# Altium PCB Chronos.PcbDoc (part 1 of 6)
Units mm, origin at the board's own origin, x right, y up, seen from the top; angles counter-clockwise.
Board outline 74.94 x 59.01 mm, 8 copper layers (TOP, L02_GND, L03_SIG, L04_PWR, L05_GND, L06_SIG, L07_GND, BOTTOM), stack 1.624 mm thick; 413 components, 238 nets, 1566 pads, 873 vias.
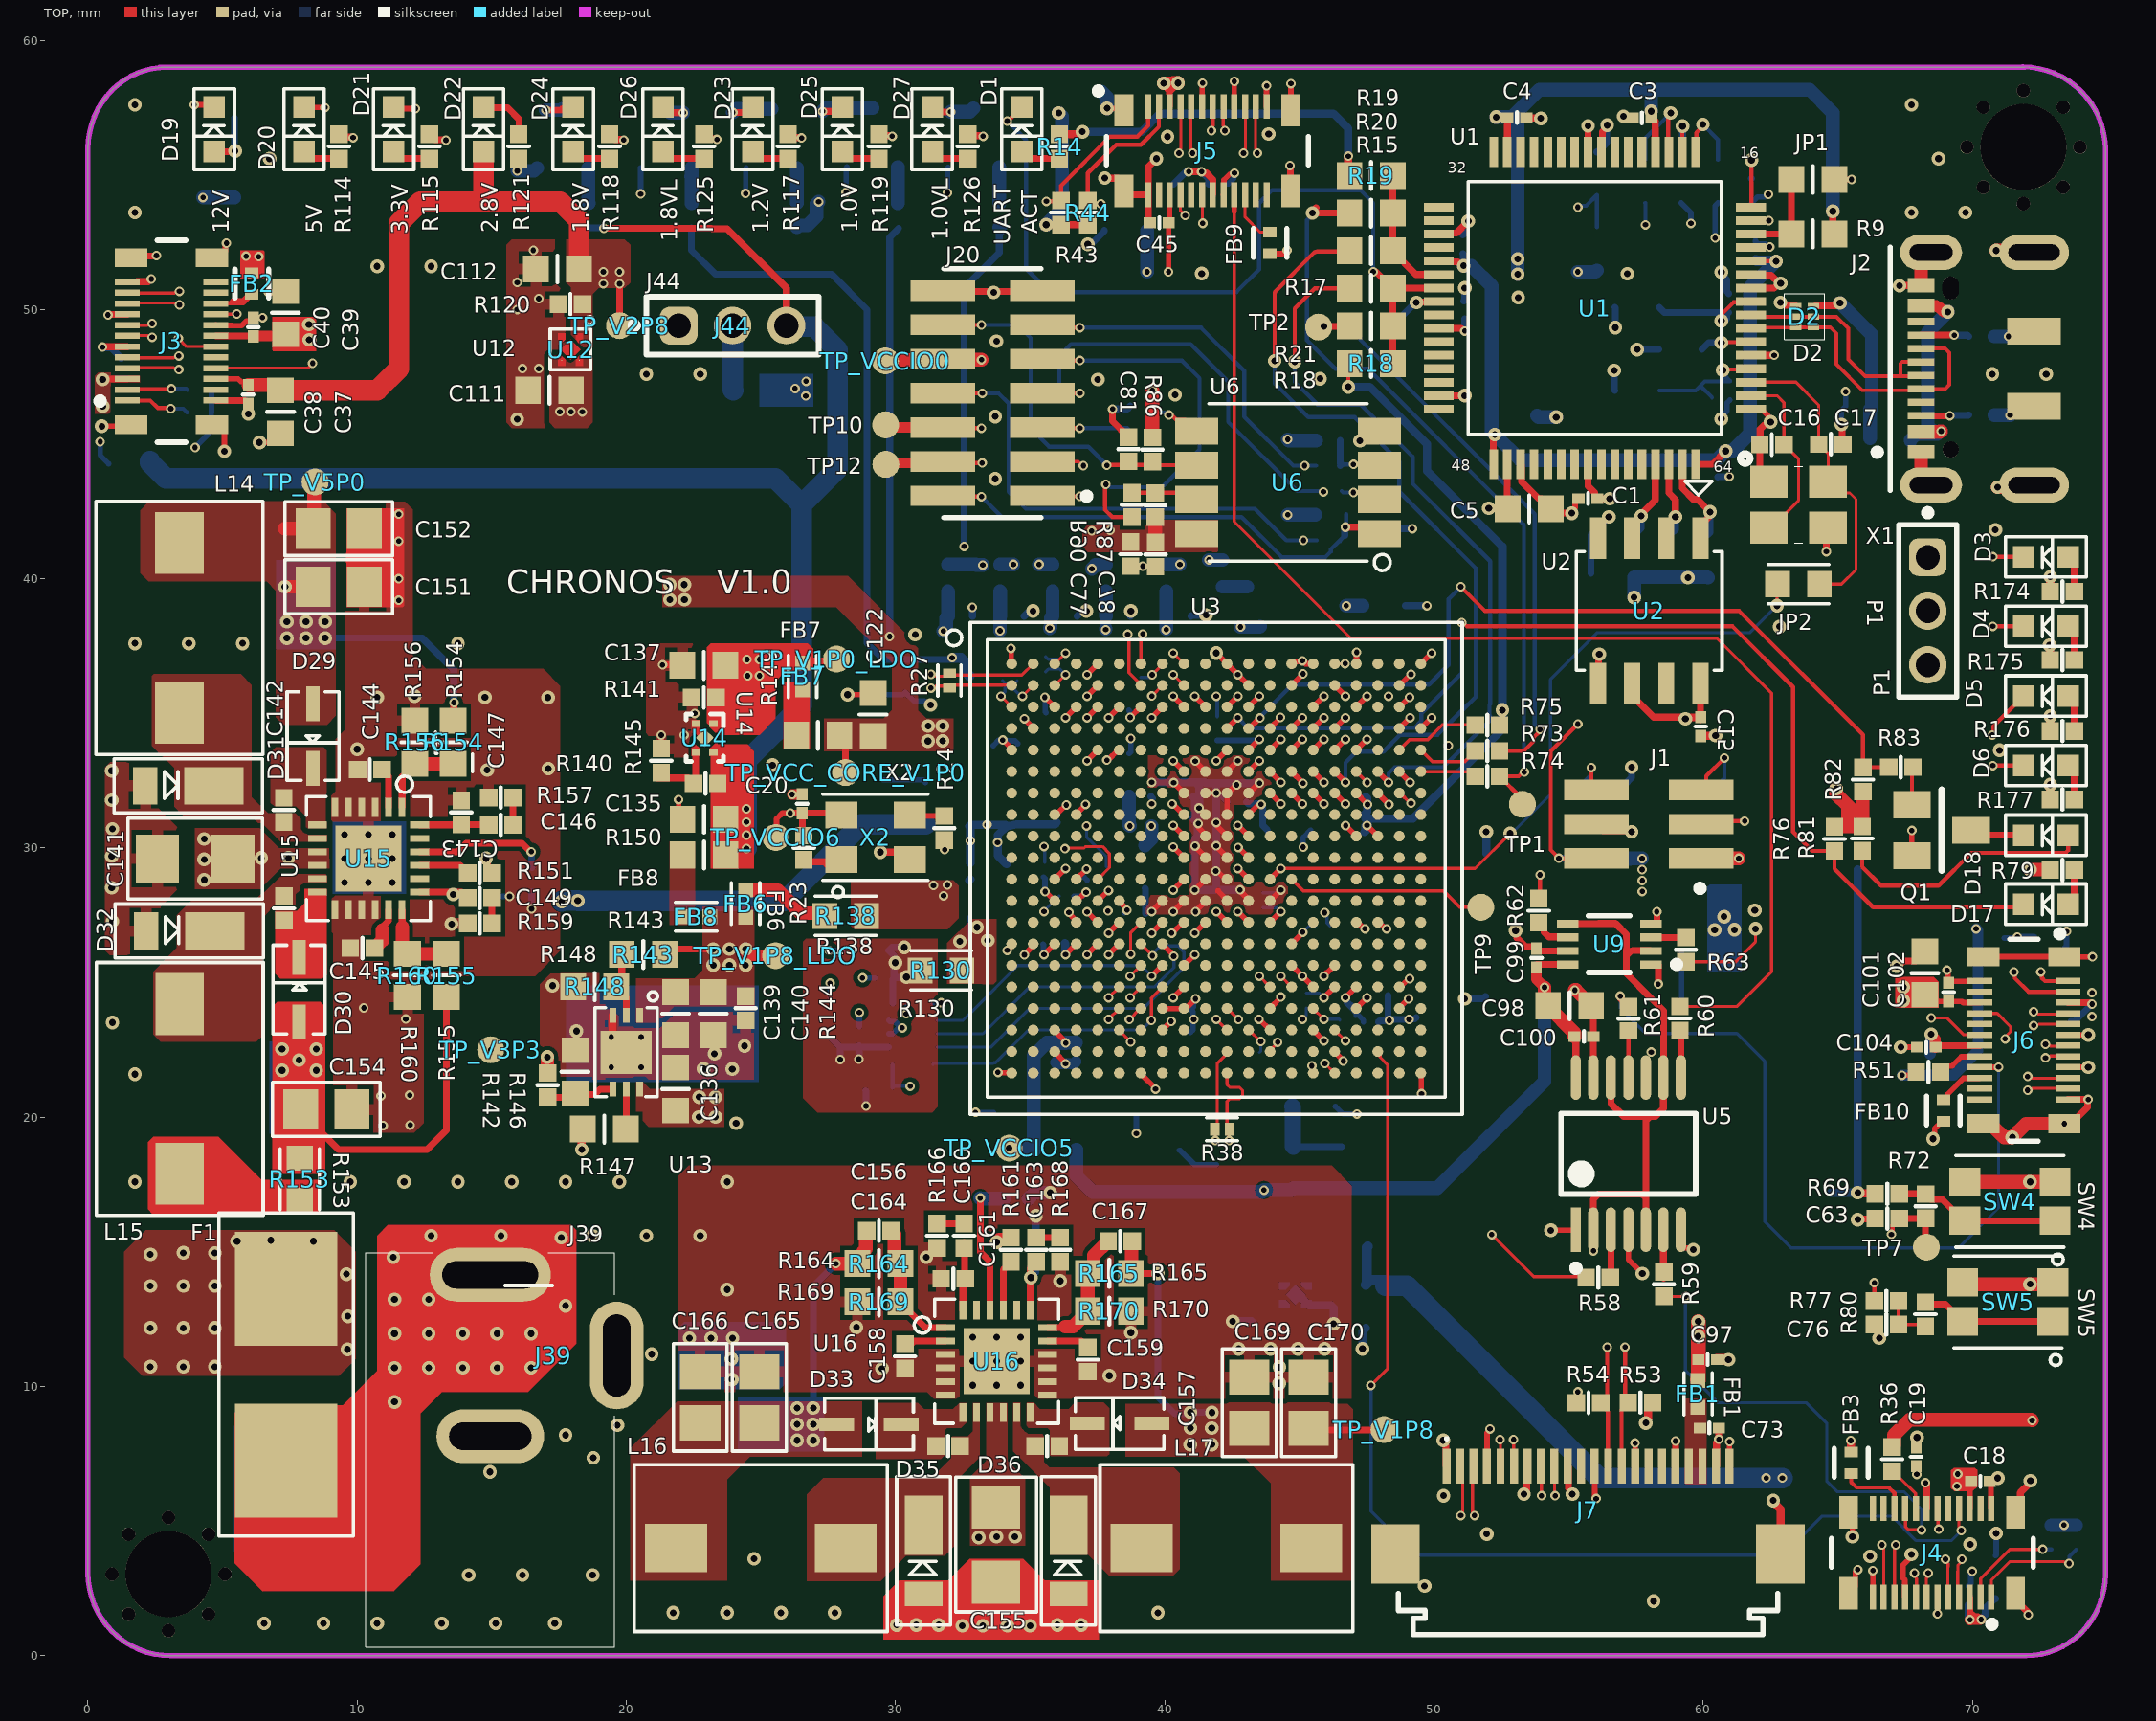
[diagram p0: TOP view]
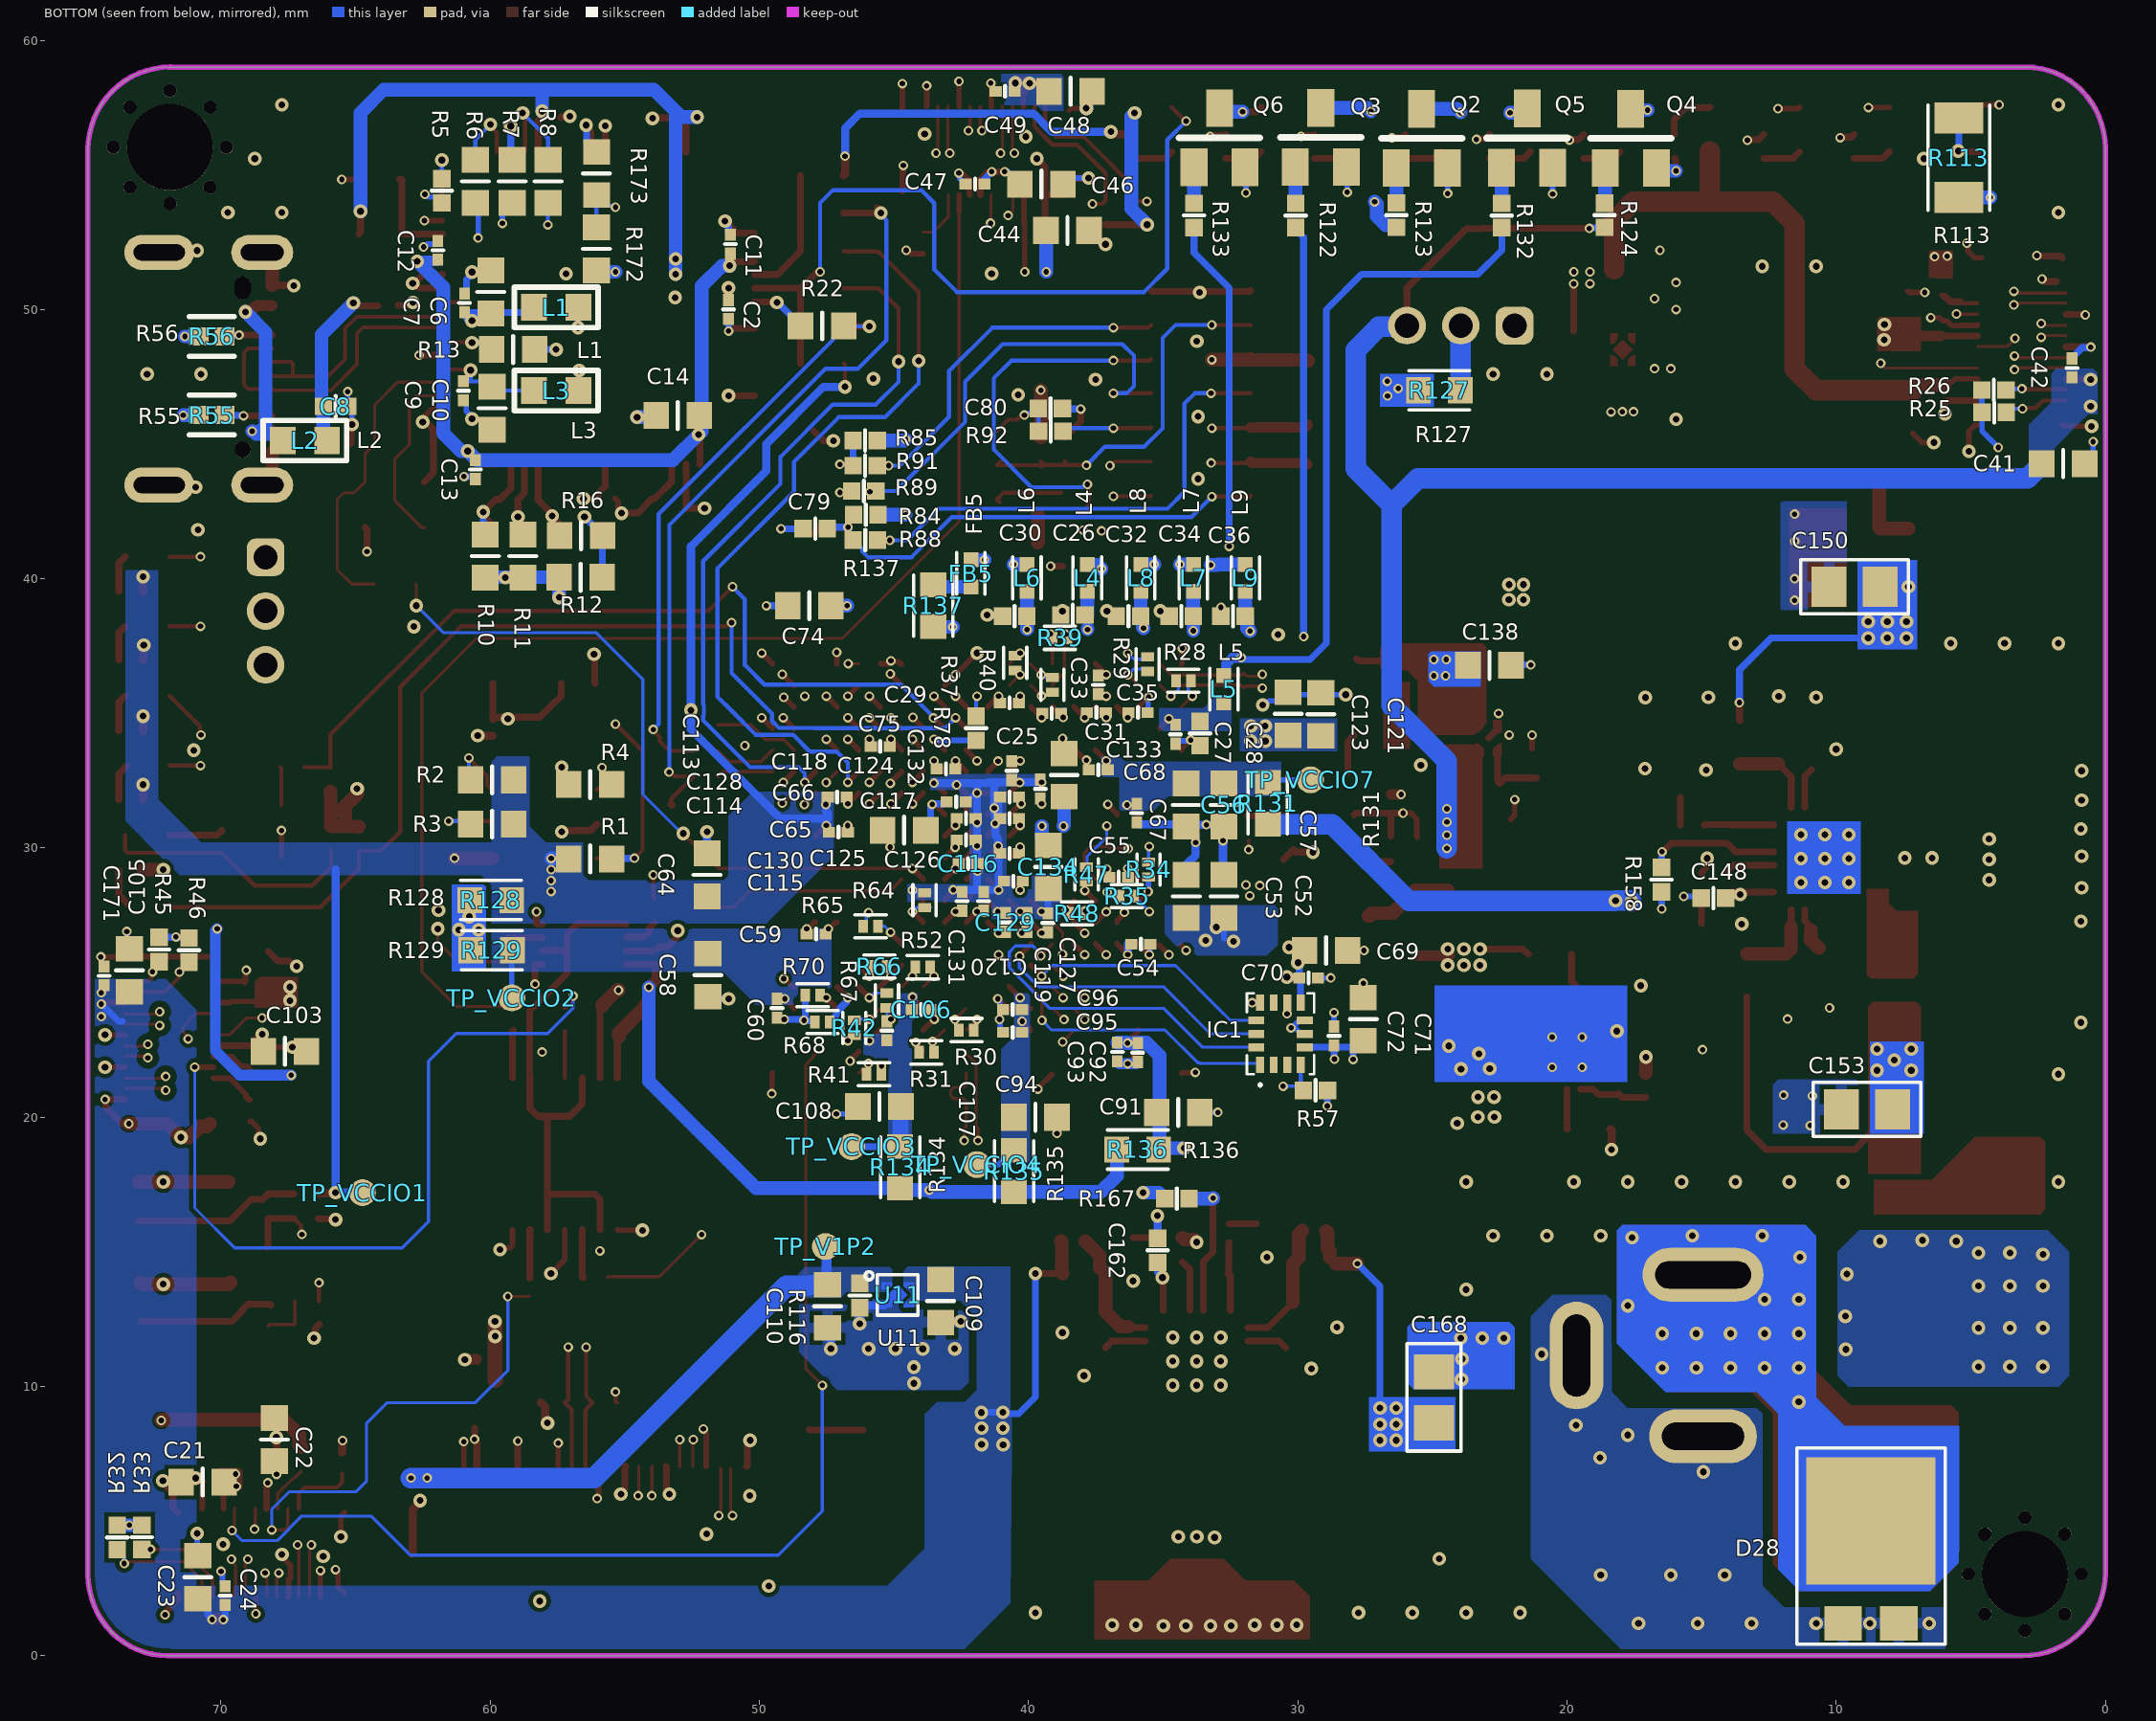
[diagram p1: BOTTOM view, seen from below]
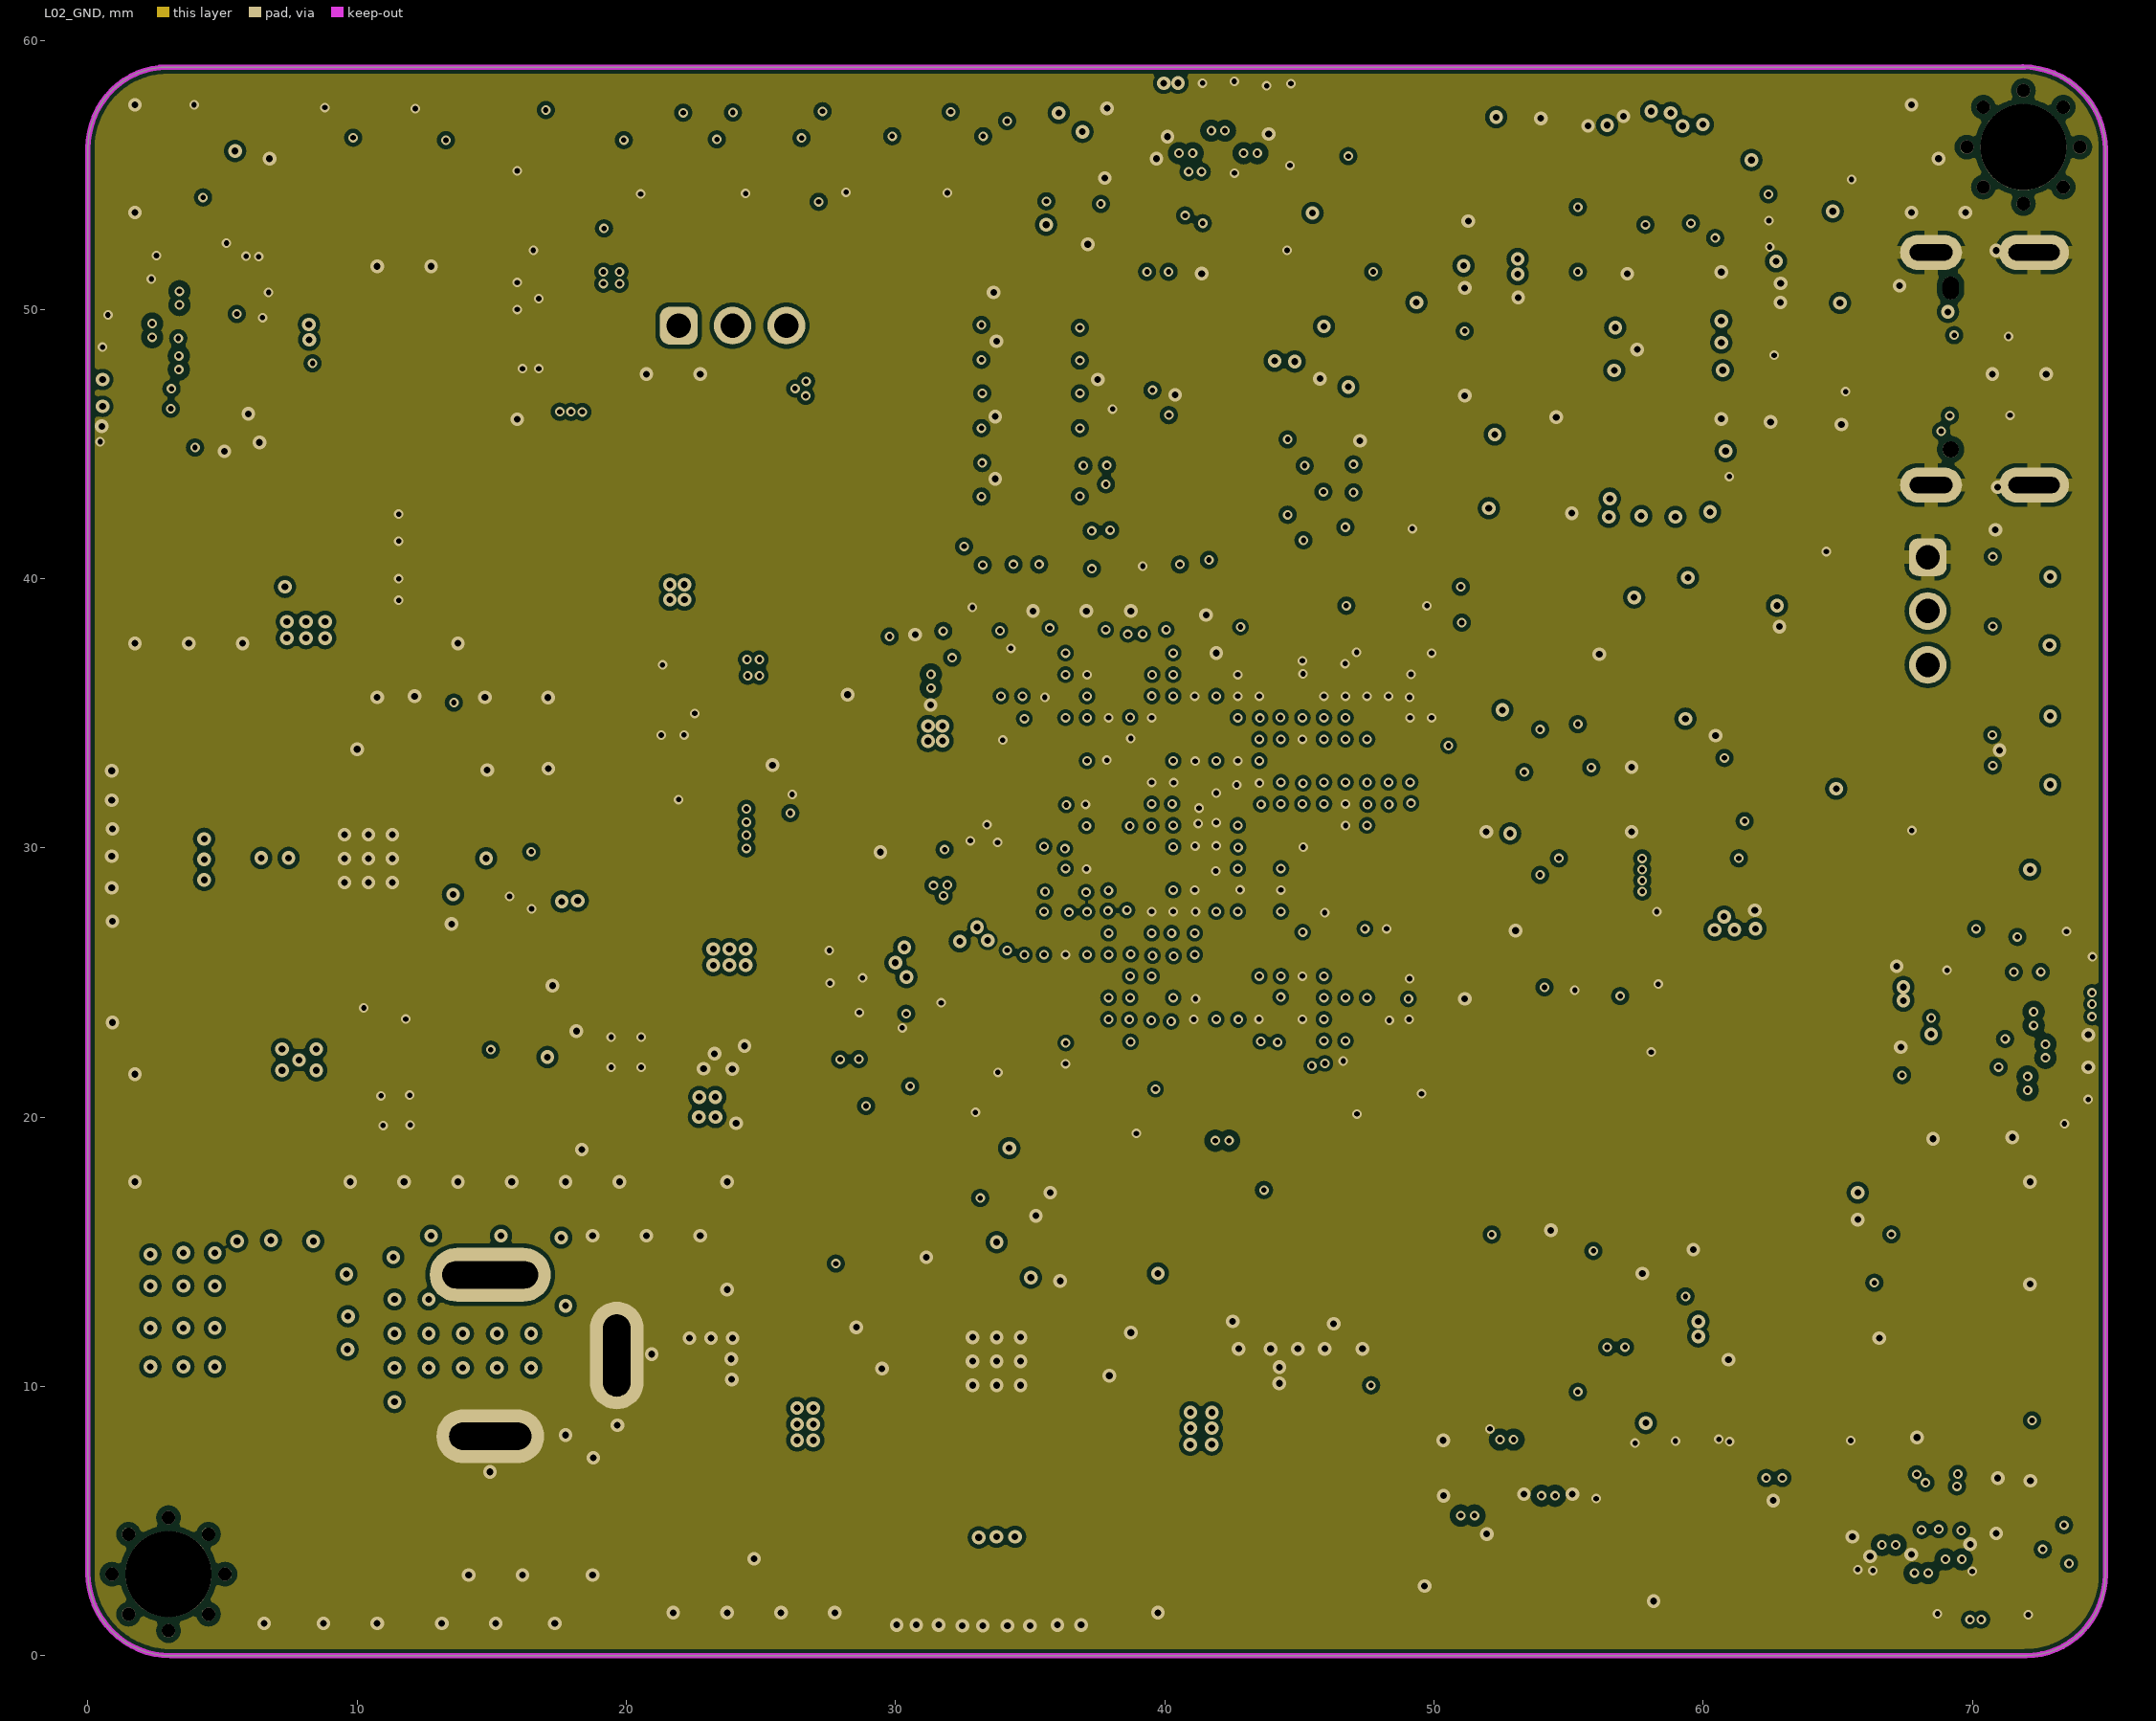
[diagram p2: L02_GND]
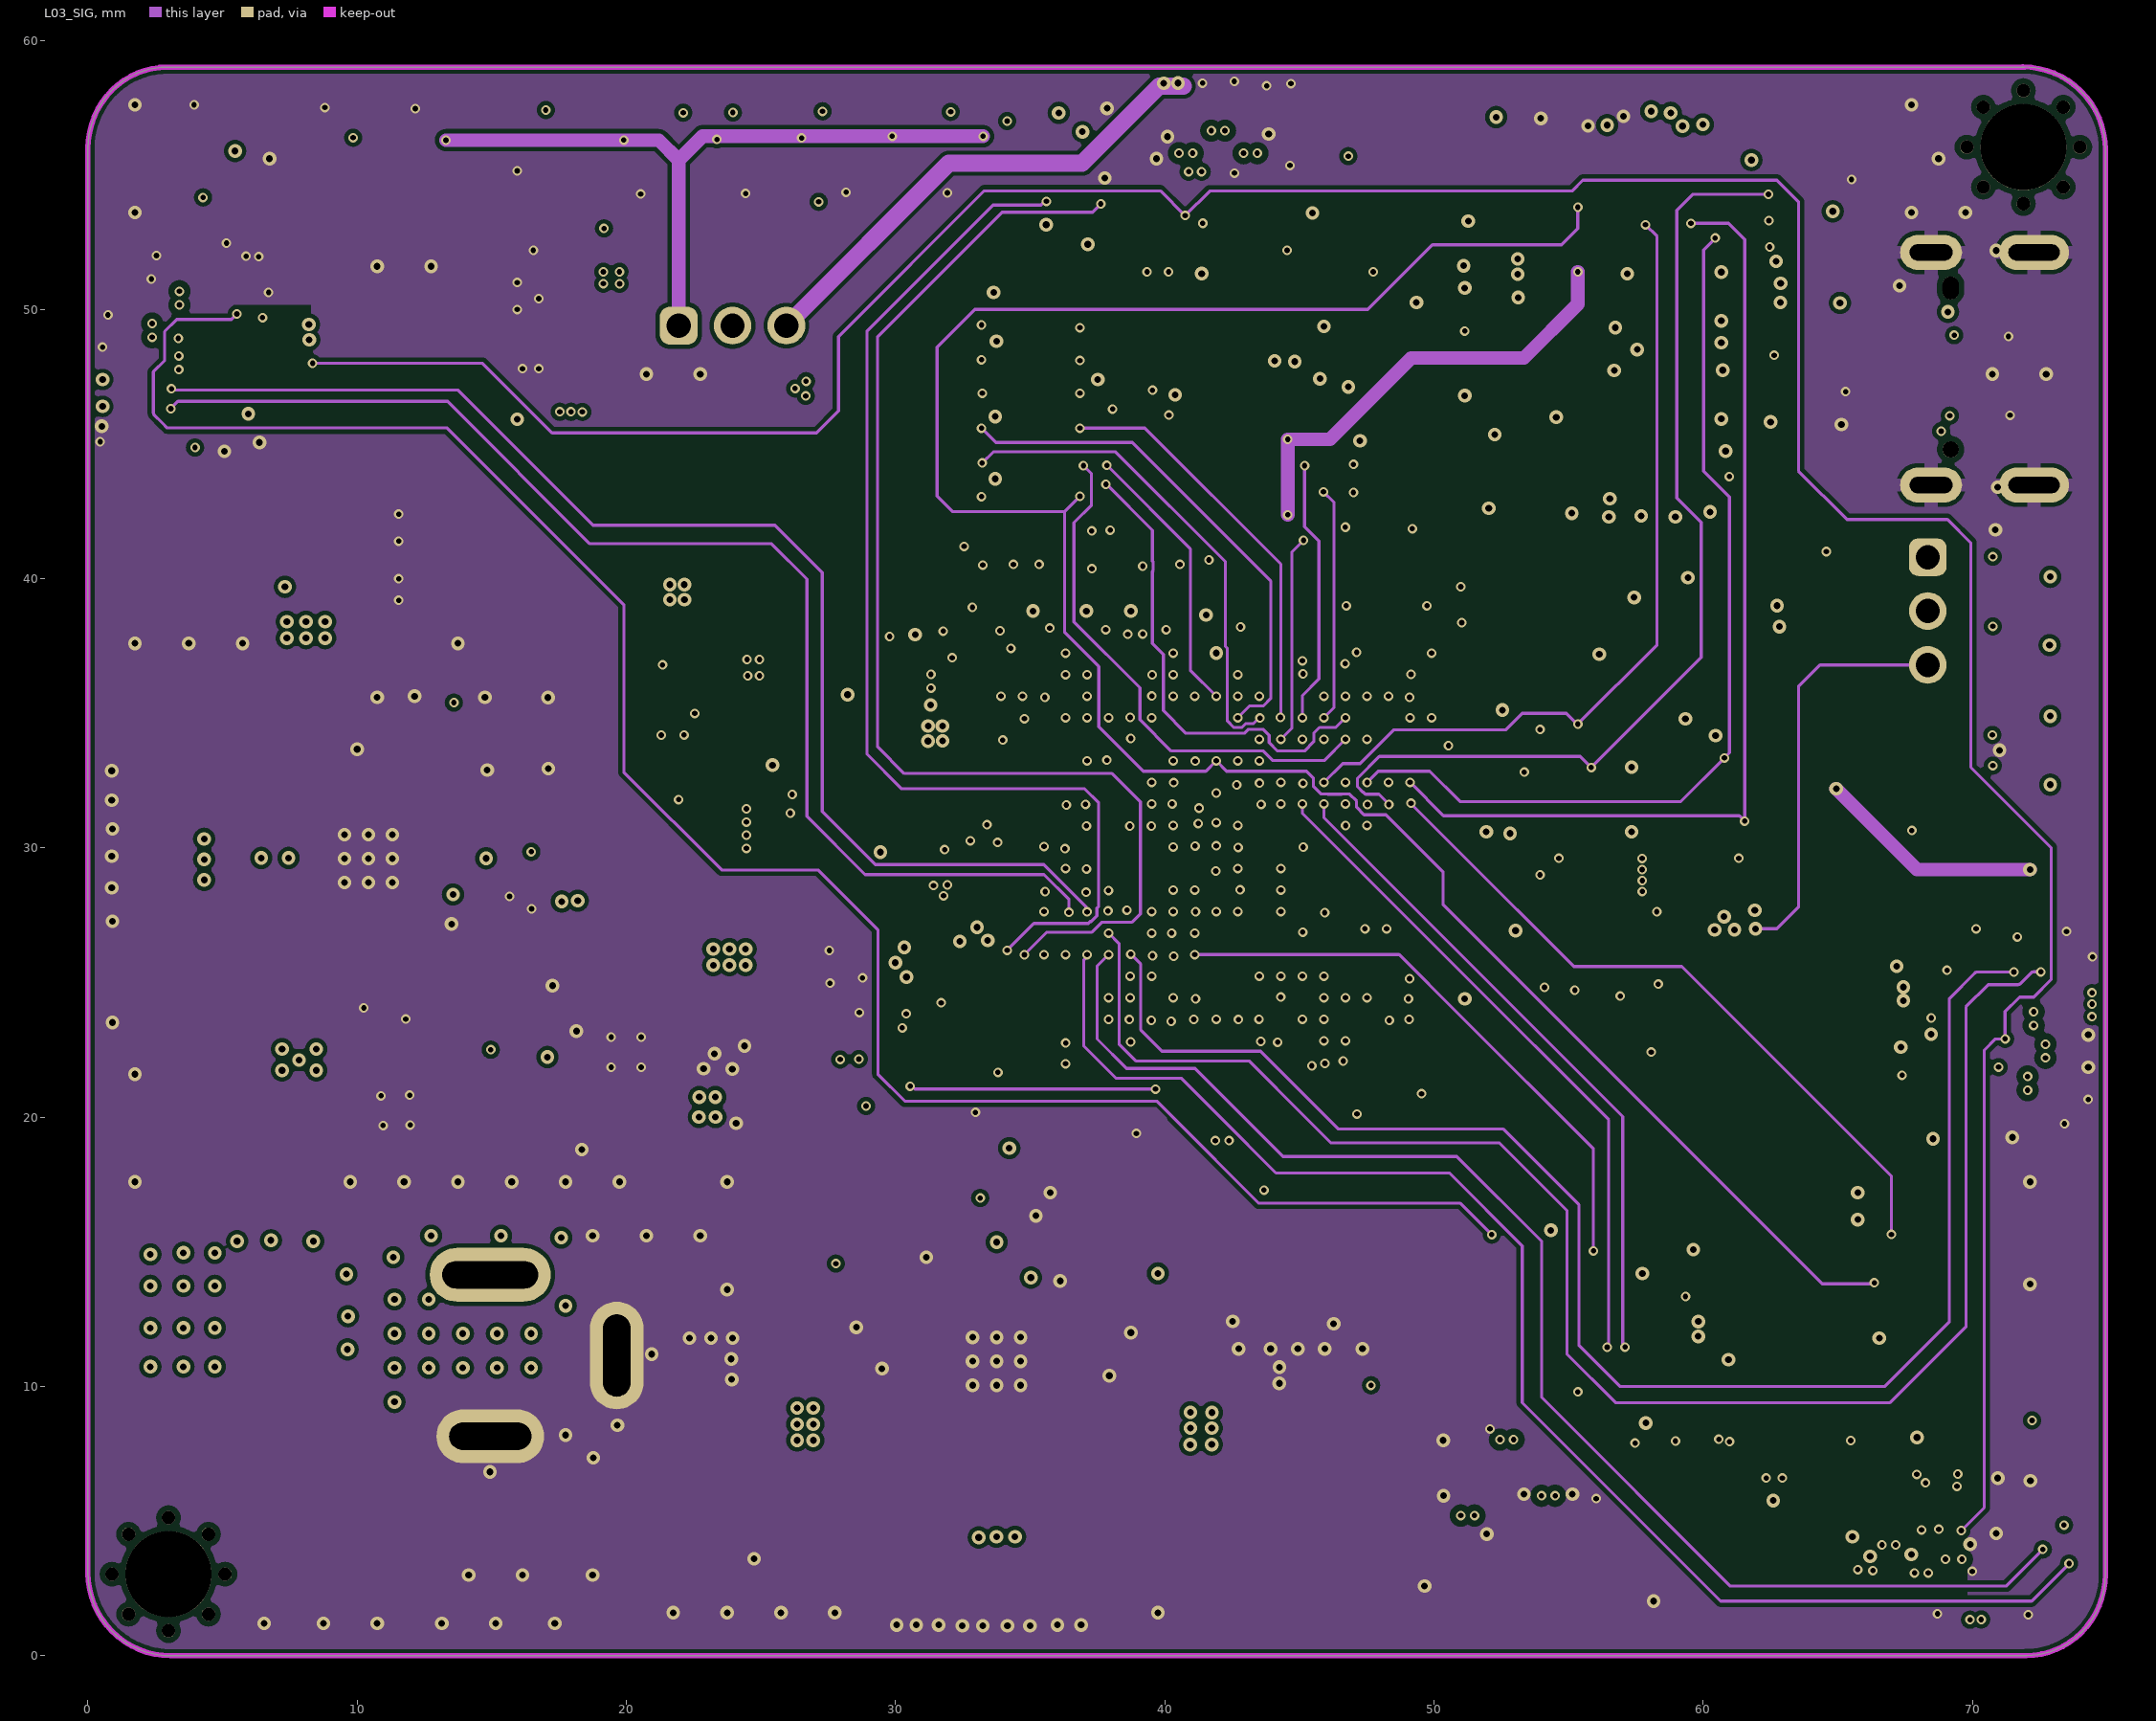
[diagram p3: L03_SIG]
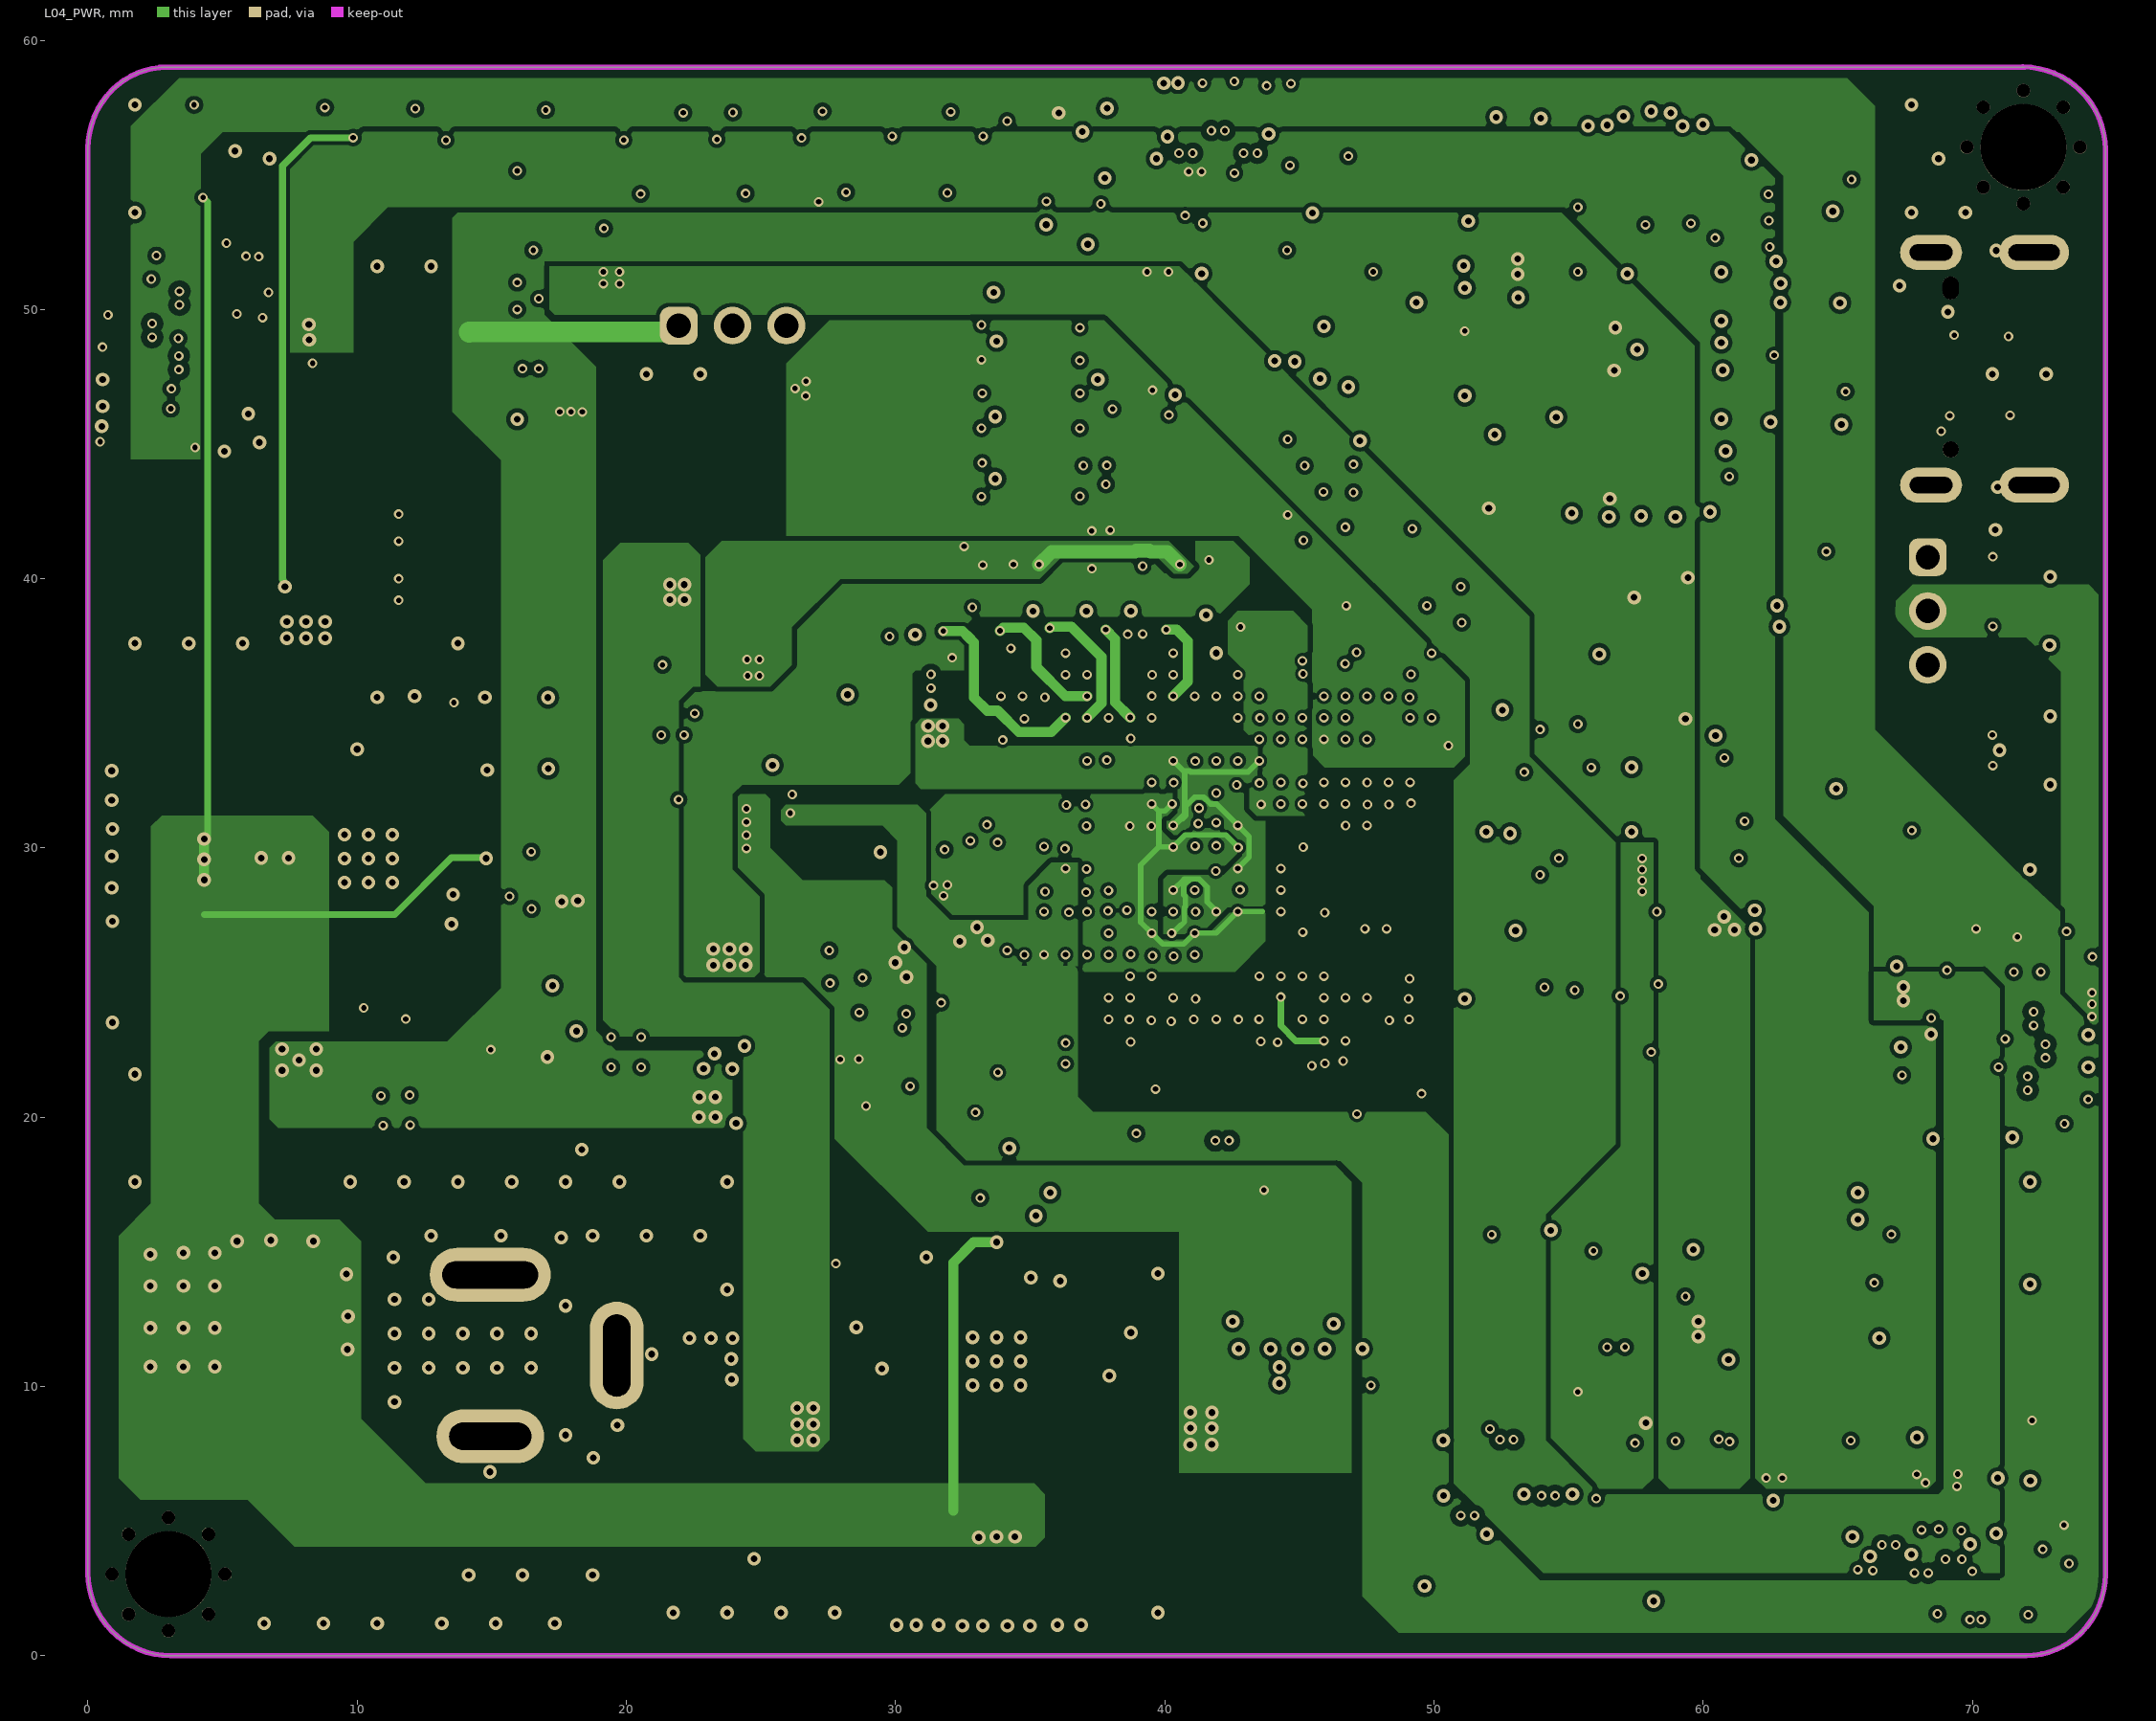
[diagram p4: L04_PWR]
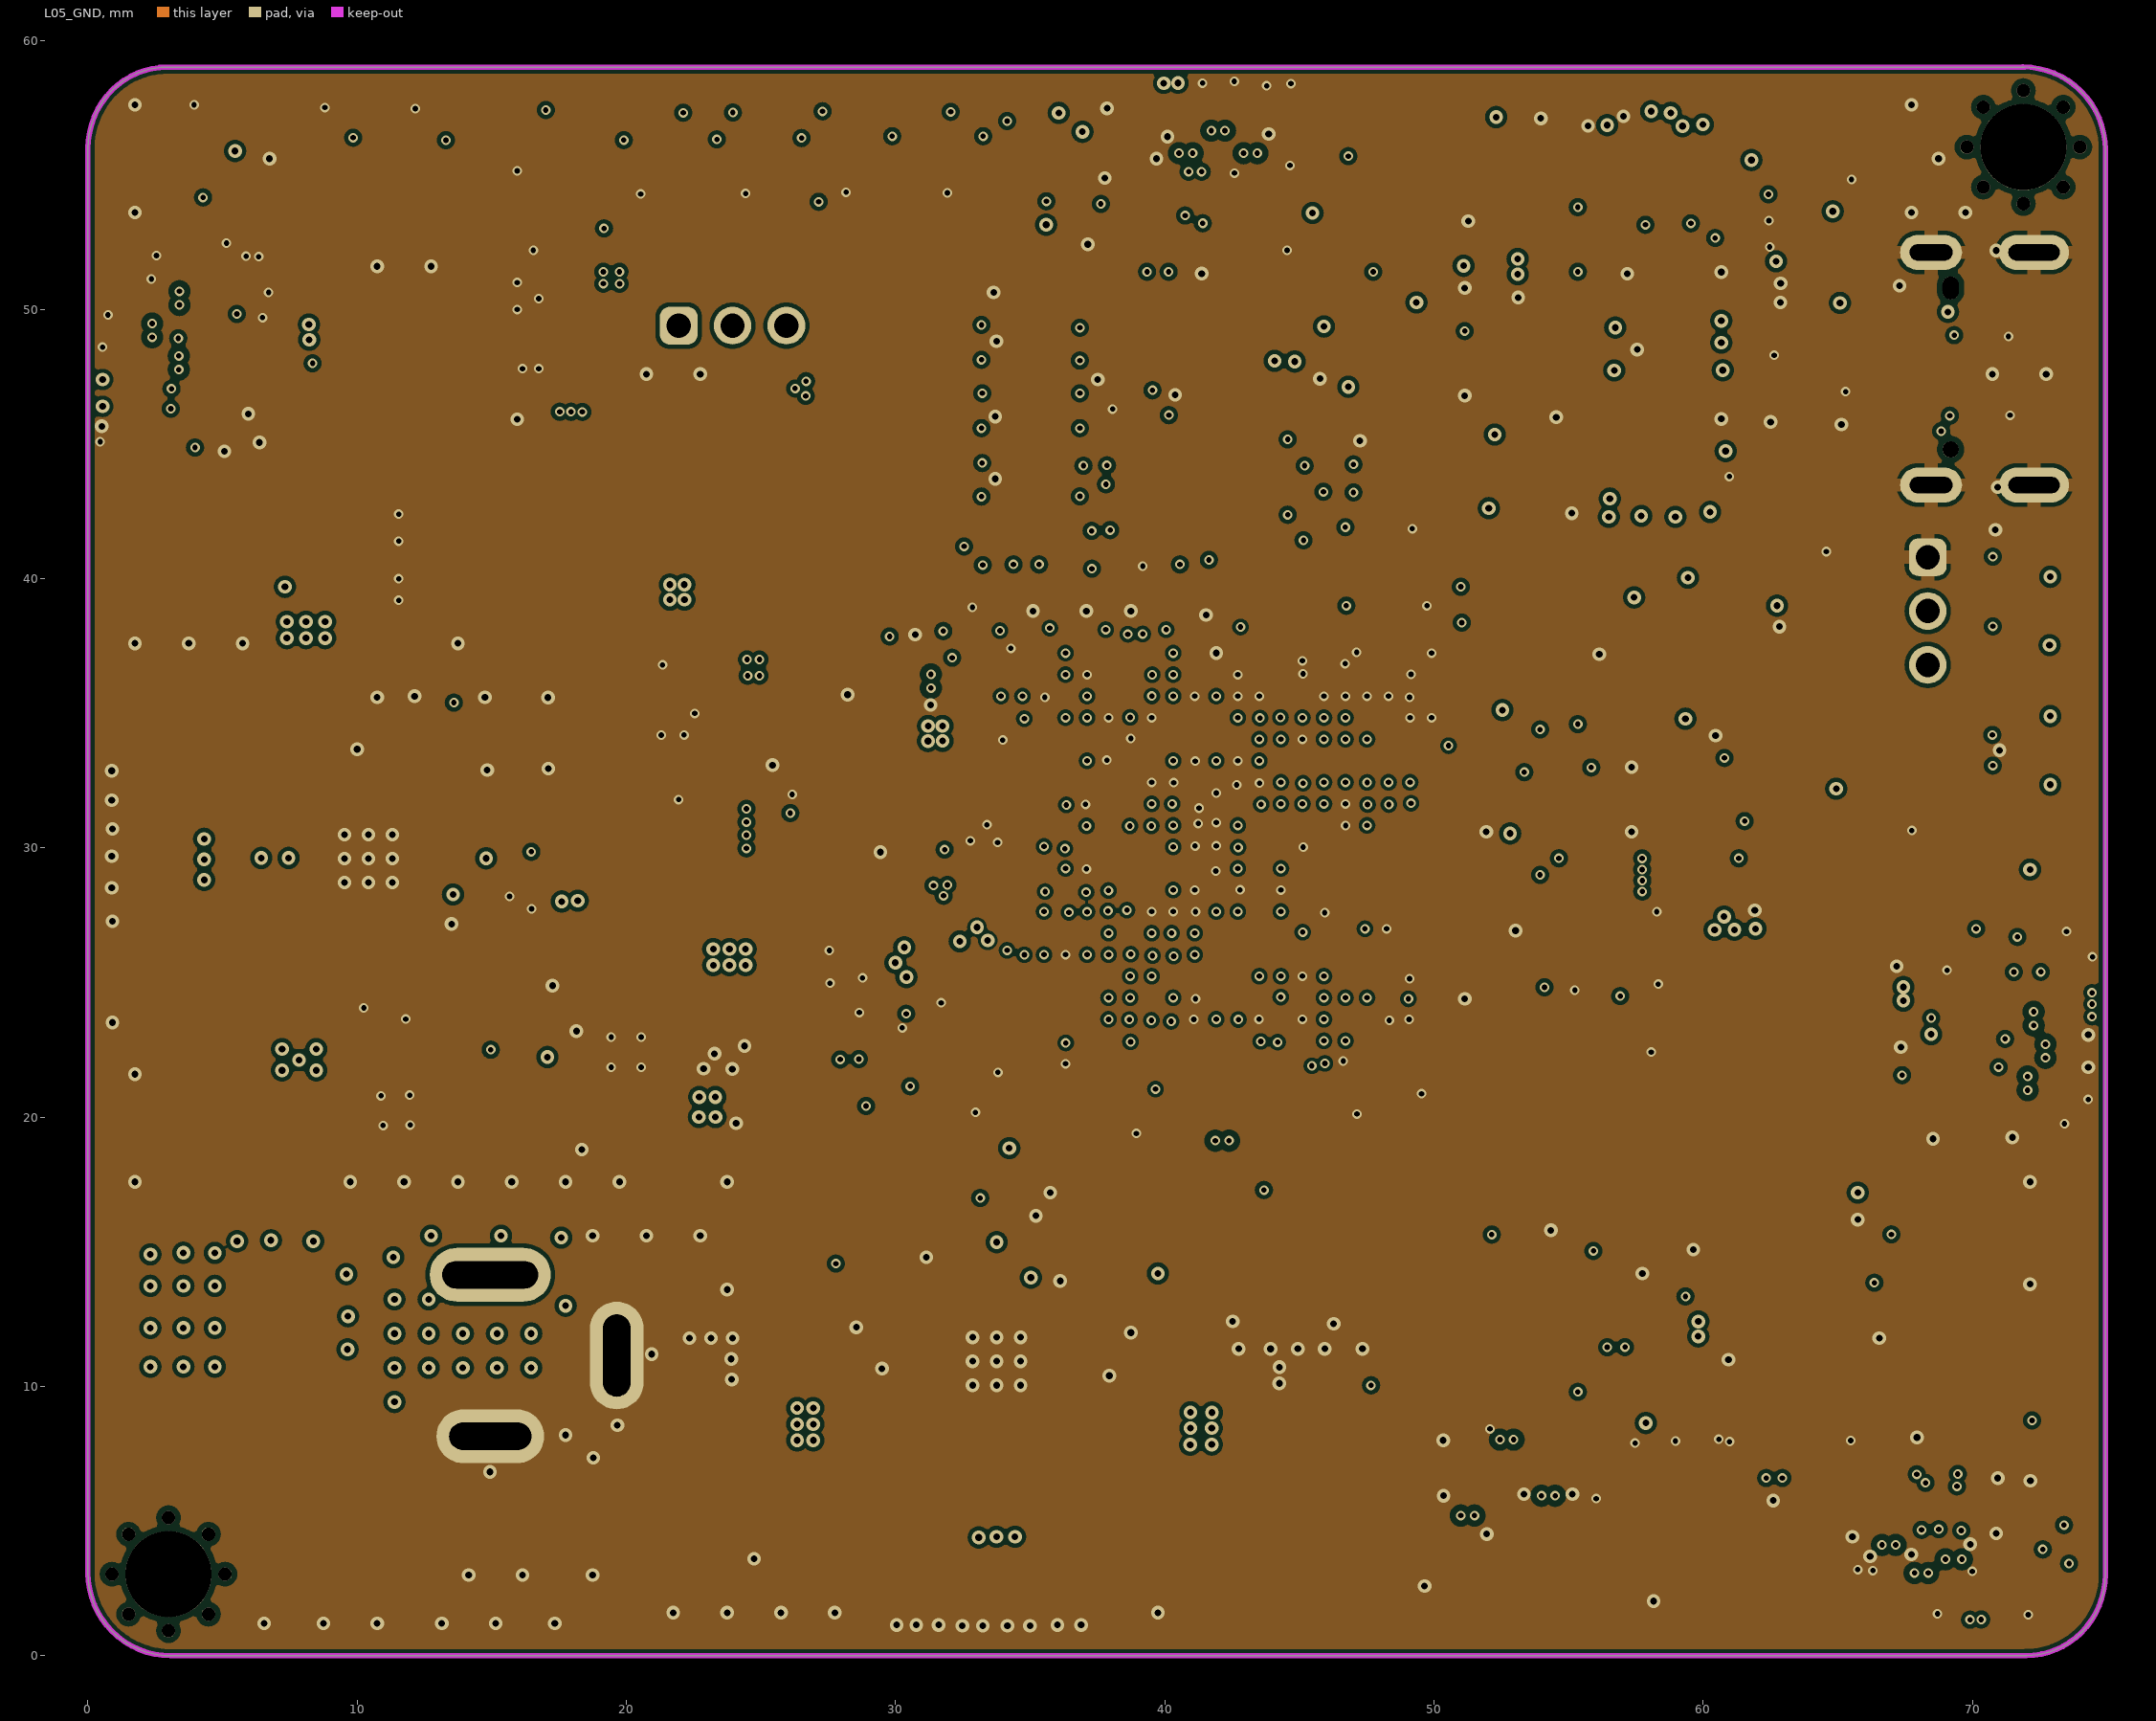
[diagram p5: L05_GND]
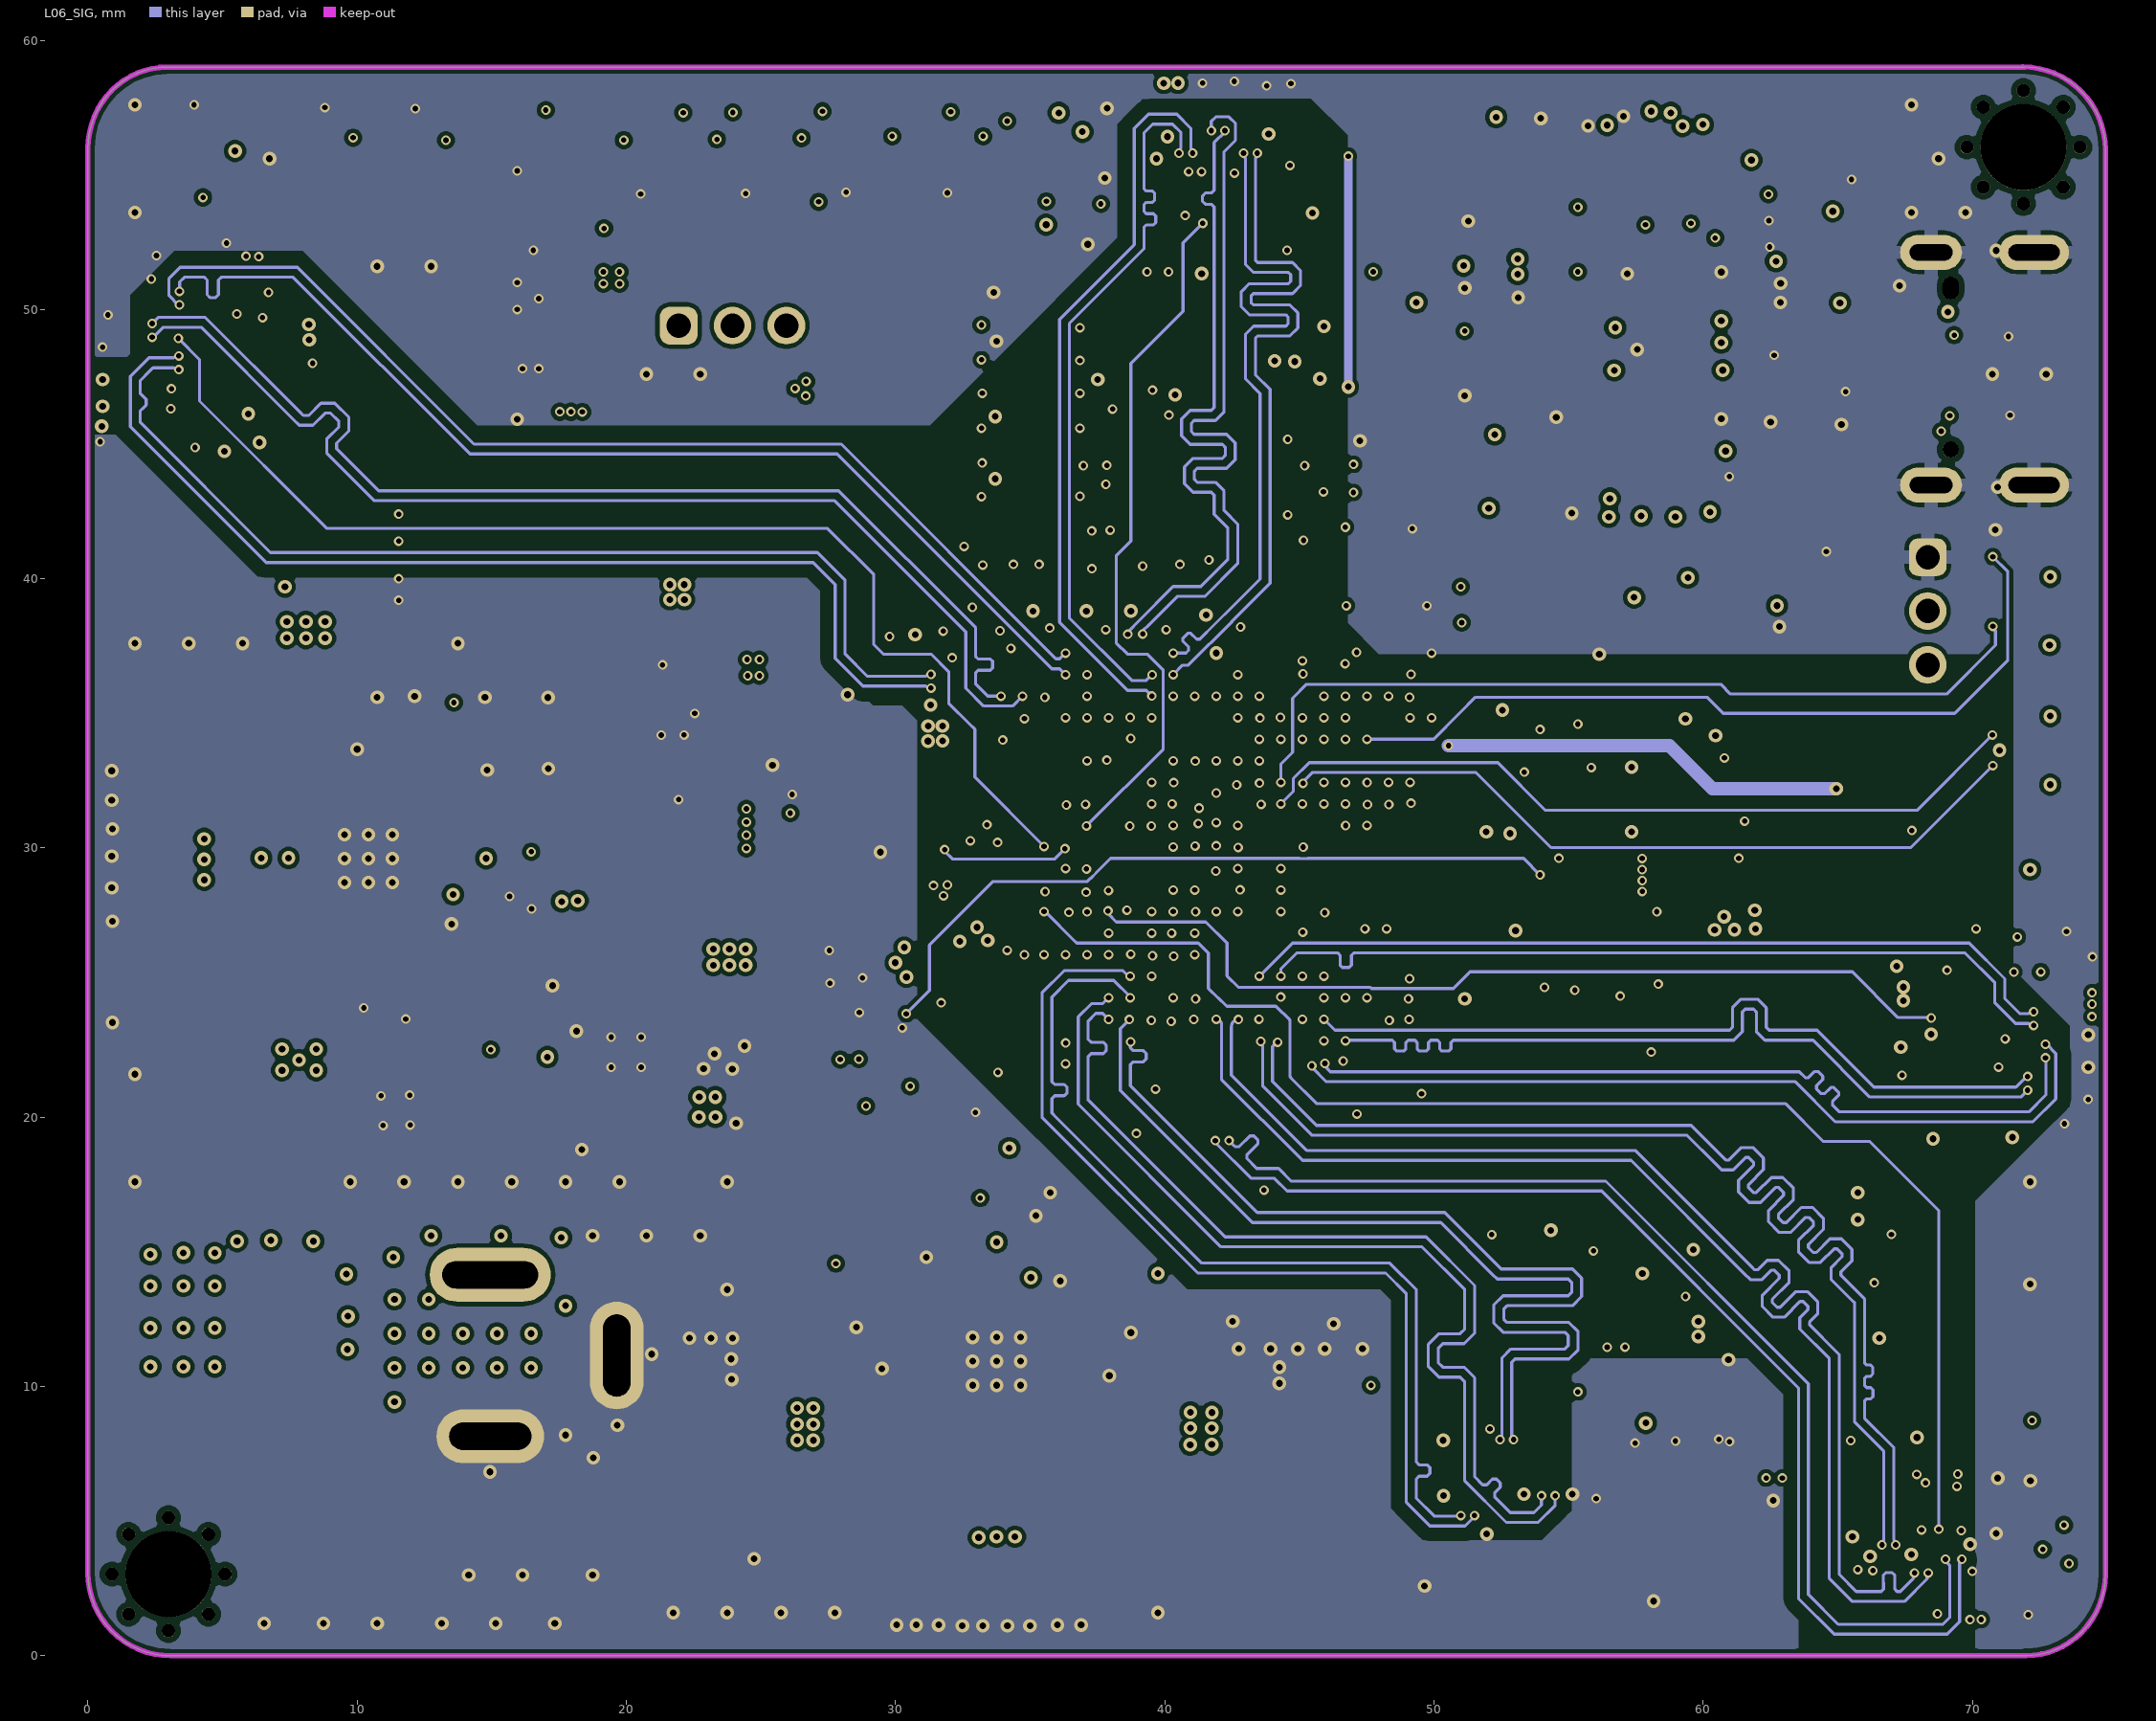
[diagram p6: L06_SIG]
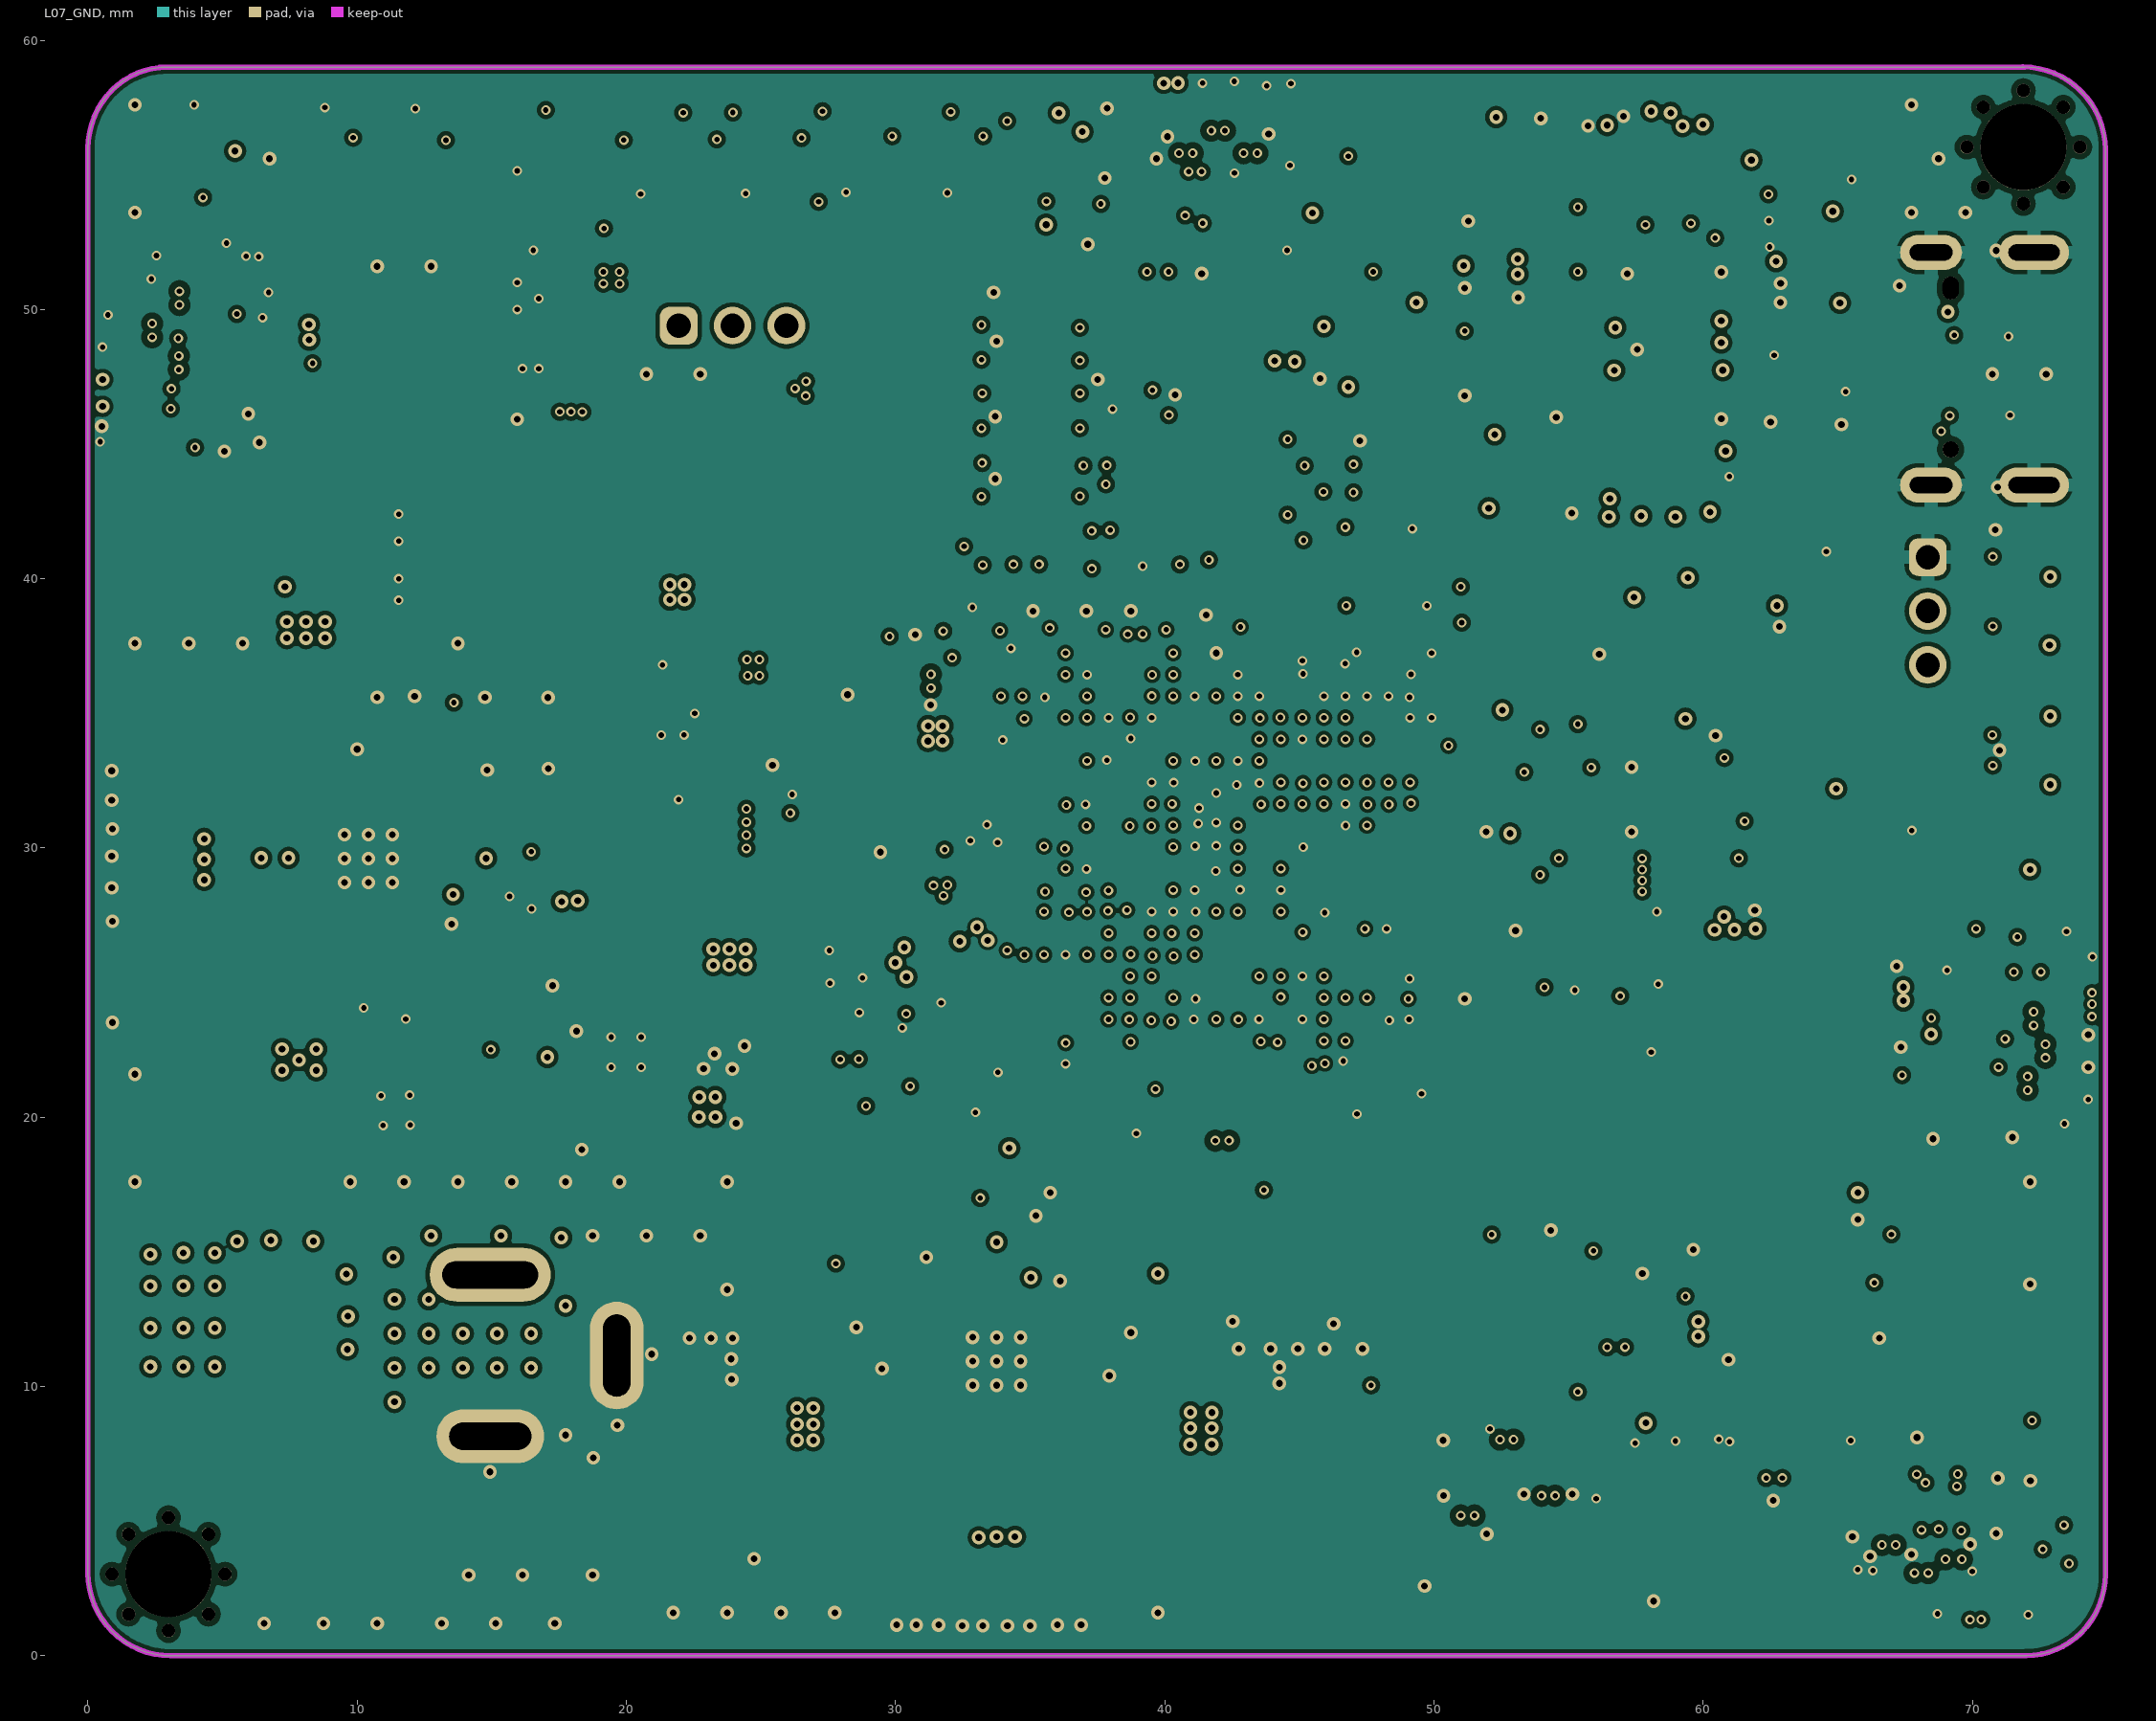
[diagram p7: L07_GND]

## Layer stack, top to bottom
Top Solder: solder mask 0.0305, Solder Resist, Dk 3.8
TOP: signal copper 0.035
Dielectric 2: prepreg 0.0764, 1080*1, Dk 3.91
L02_GND: signal copper 0.0152
Dielectric 1: core 0.1, Core, Dk 4.6
L03_SIG: signal copper 0.0152
Dielectric2: prepreg 0.2104, 7628*1, Dk 4.4
Dielectric 6: prepreg 0.084, 1080*1, Dk 3.91
Dielectric 4: prepreg 0.2104, 7628*1, Dk 4.4
L04_PWR: signal copper 0.0152
Dielectric3: core 0.1, Core, Dk 4.6
L05_GND: signal copper 0.0152
Dielectric 5: prepreg 0.2104, 7628*1, Dk 4.4
Dielectric 7: prepreg 0.084, 1080*1, Dk 3.91
Dielectric4: prepreg 0.2104, 7628*1, Dk 4.4
L06_SIG: signal copper 0.0152
Dielectric5: core 0.1, Core, Dk 4.6
L07_GND: signal copper 0.0152
Dielectric 3: prepreg 0.0764, 1080*1, Dk 3.91
BOTTOM: signal copper 0.035
Bottom Solder: solder mask 0.0305, Solder Resist, Dk 3.8

## Board outline
0.904,0.898 0.898,0.904 cw(c3.066,3.072) 0,3.072 0,55.985 cw(c3.066,55.985) 0.898,58.153 cw(c2.942,56.11) 2.942,59 71.945,59 71.871,59.009 cw(c71.871,55.943) 74.039,58.111 74.045,58.105 cw(c71.877,55.937) 74.943,55.937 74.943,3.023 cw(c71.877,3.023) 74.045,0.855 cw(c72.001,2.899) 72.001,0.009 cw(c71.98,0.03) 71.98,0 3.072,0 cw(c3.072,3.066)

## Design rules (kind name [scope] priority, off if disabled: settings)
BoardOutlineClearance [All] p1: gap=0.2 ignorepadtopadclearanceinfootprint=FALSE
Clearance Clearance_L6_DIFF100 [(ObjectKind = 'Track') And (Layer = 'L06_SIG') and  InDifferentialPairClass('DIFF100') vs IsRegion] p1: gap=0.508 ignorepadtopadclearanceinfootprint=FALSE
Clearance Clearance_BGA_ROOM [WithinRoom('BGA_ROOM')] p2: gap=0.102 ignorepadtopadclearanceinfootprint=FALSE except(0.152: SMDPad-SMDPad; 0.2: Arc-Hole Track-Hole SMDPad-Hole THPad-Hole Via-Hole Fill-Hole Poly-Hole Region-Hole Text-Hole)
Clearance Clearance_FP [HasFootprint('4XDFN_NCP110') or HasFootprint('4X2SON')] p3: gap=0.127 ignorepadtopadclearanceinfootprint=FALSE
Clearance Clearance_DIFF100_VIA [InDifferentialPairClass('DIFF100')] p4: gap=0.152 ignorepadtopadclearanceinfootprint=FALSE except(0.229: Via-Poly)
Clearance [All] p5: gap=0.152 ignorepadtopadclearanceinfootprint=FALSE except(0.2: Arc-Hole Track-Hole SMDPad-Hole THPad-Hole Via-Hole Fill-Hole Poly-Hole Region-Hole Text-Hole; 0.203: Poly-Poly Poly-Region Region-Region)
DiffPairsRouting DIFF100 [InDifferentialPairClass('DIFF100')] p1: maxlimit=0.254 minlimit=0.254 mostfreqgap=0.254 toplayer_minwidth=0.114 toplayer_maxwidth=0.114 toplayer_prefwidth=0.114 midlayer1_minwidth=0.114 midlayer1_maxwidth=0.114 midlayer1_prefwidth=0.114 midlayer2_minwidth=0.114 midlayer2_maxwidth=0.114 midlayer2_prefwidth=0.114 midlayer3_minwidth=0.114 midlayer3_maxwidth=0.114 midlayer3_prefwidth=0.114 midlayer4_minwidth=0.114 midlayer4_maxwidth=0.114 midlayer4_prefwidth=0.114 bottomlayer_minwidth=0.114 bottomlayer_maxwidth=0.114 bottomlayer_prefwidth=0.114 impedanceprofiledriven=TRUE impedanceprofileid={264413A3-5FCE-4E26-B4FE-B5022163F428} impedanceprofilevalue=100.000000 maxuncoupledlength=12.7
DiffPairsRouting DIFF90 [InDifferentialPairClass('DIFF90')] p2: maxlimit=0.305 minlimit=0.254 mostfreqgap=0.305 toplayer_mingap=0.305 toplayer_minwidth=0.14 toplayer_maxwidth=0.14 toplayer_prefwidth=0.14 midlayer1_mingap=0.305 midlayer1_minwidth=0.14 midlayer1_maxwidth=0.14 midlayer1_prefwidth=0.14 midlayer2_mingap=0.305 midlayer2_minwidth=0.14 midlayer2_maxwidth=0.14 midlayer2_prefwidth=0.14 midlayer3_mingap=0.305 midlayer3_minwidth=0.14 midlayer3_maxwidth=0.14 midlayer3_prefwidth=0.14 midlayer4_mingap=0.305 midlayer4_minwidth=0.14 midlayer4_maxwidth=0.14 midlayer4_prefwidth=0.14 bottomlayer_mingap=0.305 bottomlayer_minwidth=0.14 bottomlayer_maxwidth=0.14 bottomlayer_prefwidth=0.14 impedanceprofiledriven=TRUE impedanceprofileid={8189A2EA-0DD5-4C08-80AF-64DA1011C4EC} impedanceprofilevalue=90.000000 maxuncoupledlength=12.7
HoleSize [All] p1: absolutevalues=TRUE maxlimit=3.81 minlimit=0.025 maxpercent=80.000 minpercent=20.000
HoleToHoleClearance [All] p1: gap=0.2 allowstackedmicrovias=TRUE
MatchedLengths MG_CAM [InNetClass('CAM')] p1: tolerance=1 checknetsindiffpair=FALSE checkdiffpairvsdiffpair=TRUE checkxsignals=TRUE checkothers=TRUE
MatchedLengths MG_CAM_0 [InNetClass('CAM0')] p2: tolerance=1 checknetsindiffpair=FALSE checkdiffpairvsdiffpair=TRUE checkxsignals=TRUE checkothers=TRUE
MatchedLengths MG_CAM_1 [InNetClass('CAM1')] p3: tolerance=1 checknetsindiffpair=FALSE checkdiffpairvsdiffpair=TRUE checkxsignals=TRUE checkothers=TRUE
MatchedLengths MG_CAM_2 [InNetClass('CAM2')] p4: tolerance=1 checknetsindiffpair=FALSE checkdiffpairvsdiffpair=TRUE checkxsignals=TRUE checkothers=TRUE
MatchedLengths MG_CAM_3 [InNetClass('CAM3')] p5: tolerance=1 checknetsindiffpair=FALSE checkdiffpairvsdiffpair=TRUE checkxsignals=TRUE checkothers=TRUE
MatchedLengths MI_CAM [InDifferentialPairClass('DIFF100')] p6: tolerance=0.1 checknetsindiffpair=TRUE checkdiffpairvsdiffpair=FALSE checkxsignals=FALSE checkothers=FALSE
MinimumAnnularRing [not ((ObjectKind = 'Pad') and (Component = 'Free'))] p1: minimumring=0.075
MinimumSolderMaskSliver [All] p1: minsoldermaskwidth=0.076
PlaneConnect [All] p1: planeconnectstyle=Direct reliefexpansion=0.508 reliefentries=4 reliefconductorwidth=0.254 reliefairgap=0.254
PolygonConnect PolygonConnect_1 [All vs InNet('GND')] p1: thpad.connectstyle=Relief thpad.reliefconductorwidth=0.508 thpad.reliefentries=4 thpad.polygonreliefangle="90 Angle" thpad.airgapwidth=0.152 smdpad.connectstyle=Relief smdpad.reliefconductorwidth=0.406 smdpad.reliefentries=4 smdpad.polygonreliefangle="90 Angle" smdpad.airgapwidth=0.152 via.connectstyle=Direct via.reliefconductorwidth=0.305 via.reliefentries=4 via.polygonreliefangle="90 Angle" via.airgapwidth=0.152
PolygonConnect [All] p2: thpad.connectstyle=Relief thpad.reliefconductorwidth=0.254 thpad.reliefentries=4 thpad.polygonreliefangle="90 Angle" thpad.airgapwidth=0.254 smdpad.connectstyle=Direct smdpad.reliefconductorwidth=0.254 smdpad.reliefentries=4 smdpad.polygonreliefangle="90 Angle" smdpad.airgapwidth=0.152 via.connectstyle=Direct via.reliefconductorwidth=0.254 via.reliefentries=4 via.polygonreliefangle="90 Angle" via.airgapwidth=0.254
RoomDefinition BGA_ROOM [False vs False] p1: confinementstyle=ConfineIn formatcopy=TRUE lockcomponents=FALSE outline 32.745,38.4 50.945,38.4 50.945,20 32.745,20
RoutingVias [All] p1: holewidth=0.2 width=0.35 viastyle="Through Hole" minholewidth=0.2 minwidth=0.35 maxholewidth=0.4 maxwidth=0.7
SilkToSilkClearance [All] p1: silktosilkclearance=0
SilkToSolderMaskClearance [IsText] p1: minsilkscreentomaskgap=0.15 clearancetoexposedcopper=TRUE
SolderMaskExpansion [All] p1: expansion=0 istentingtop=FALSE
Width [All] p1: maxlimit=0.762 minlimit=0.114 preferedwidth=0.152
23 further rules are at their usual default settings.

## Classes and differential pairs
net class CAM: CSI_TX_CLK_N CSI_TX_CLK_P CSI_TX_D0_N CSI_TX_D0_P CSI_TX_D1_N CSI_TX_D1_P
differential pair class DIFF100: CAM0_0 CAM0_1 CAM0_CLK CAM1_0 CAM1_1 CAM1_CLK CAM2_0 CAM2_1 CAM2_CLK CAM3_0 CAM3_1 CAM3_CLK CSI_TX_CLK CSI_TX_D0 CSI_TX_D1
differential pair class DIFF90: USB_D
net class CAM3: CAM3_0_N CAM3_0_P CAM3_1_N CAM3_1_P CAM3_CLK_N CAM3_CLK_P
net class CAM2: CAM2_0_N CAM2_0_P CAM2_1_N CAM2_1_P CAM2_CLK_N CAM2_CLK_P
net class CAM1: CAM1_0_N CAM1_0_P CAM1_1_N CAM1_1_P CAM1_CLK_N CAM1_CLK_P
net class CAM0: CAM0_0_N CAM0_0_P CAM0_1_N CAM0_1_P CAM0_CLK_N CAM0_CLK_P
component class "12 - JETSON_CON": C73 C97 FB1 J7 R53 R54
component class "11- IMU": C69 C70 C71 C72 IC1 R57
component class "10 - Configuration And ADC": C74 C75 C76 C77 C78 C79 C80 C81 D17 D18 J20 Q1 R64 R65 R66 R67 R68 R70 R76 R77 R78 R79 R80 R81 R82 R83 R84 R85 R86 R87 R88 R89 R90 R91 R92 SW5 TP10 TP12 U3 U6
component class "09- I2C, LEDs And Push Button": C63 C64 C65 C66 D3 D4 D5 D6 R69 R72 R73 R74 R75 R174 R175 R176 R177 SW4 TP7 TP9
component class "08- Bank2_6_7": C20 C52 C53 C54 C55 C56 C57 C58 C59 C60 C67 C68 R23 R24 R34 R35 R47 R48 X2
component class "07 - USB Interface": C1 C2 C3 C4 C5 C6 C7 C8 C9 C10 C11 C12 C13 C14 C15 C16 C17 D1 D2 J1 J2 JP1 JP2 L1 L2 L3 R1 R2 R3 R4 R5 R6 R7 R8 R9 R10 R11 R12 R13 R14 R15 R16 R17 R18 R19 R20 R21 R22 R55 R56 R172 R173 TP1 TP2 U1 U2 X1
component class "06 - Soft_DPHY": C91 C92 C93 C94 C95 C96 C98 C99 C100 C106 C107 C108 P1 R58 R59 R60 R61 R62 R63 U5 U9
component class "05 - Camera Interface 2": C25 C26 C29 C30 C31 C32 C44 C45 C46 C47 C48 C49 C101 C102 C103 C104 C105 C171 FB9 FB10 J5 J6 L4 L6 L8 R37 R39 R40 R41 R42 R43 R44 R45 R46 R51 R52
component class "04 - Camera Interface": C18 C19 C21 C22 C23 C24 C27 C28 C33 C34 C35 C36 C37 C38 C39 C40 C41 C42 FB2 FB3 J3 J4 L5 L7 L9 R25 R26 R27 R28 R29 R30 R31 R32 R33 R36 R38
component class "03- Power Decoupling": C113 C114 C115 C116 C117 C118 C119 C120 C121 C122 C123 C124 C125 C126 C127 C128 C129 C130 C131 C132 C133 C134 FB5 FB6 R137 R138
component class "02 - Power CSI and Bank Power": C109 C110 C111 C112 D19 D20 D21 D22 D23 D24 D25 D26 D27 J44 Q2 Q3 Q4 Q5 Q6 R113 R114 R115 R116 R117 R118 R119 R120 R121 R122 R123 R124 R125 R126 R127 R128 R129 R130 R131 R132 R133 R134 R135 R136 TP_V1P0_LDO TP_V1P2 TP_V1P8 TP_V1P8_LDO TP_V2P8 TP_V3P3 TP_V5P0 TP_VCC_CORE_V1P0 TP_VCCIO0 TP_VCCIO1 TP_VCCIO2 TP_VCCIO3 TP_VCCIO4 TP_VCCIO5 TP_VCCIO6 TP_VCCIO7 U11 U12
component class "01- Power Regulators": C135 C136 C137 C138 C139 C140 C141 C142 C143 C144 C145 C146 C147 C148 C149 C150 C151 C152 C153 C154 C155 C156 C157 C158 C159 C160 C161 C162 C163 C164 C165 C166 C167 C168 C169 C170 D28 D29 D30 D31 D32 D33 D34 D35 D36 F1 FB7 FB8 J39 L14 L15 L16 L17 R140 R141 R142 R143 R144 R145 R146 R147 R148 R149 R150 R151 R153 R154 R155 R156 R157 R158 R159 R160 R161 R164 R165 R166 R167 R168 R169 R170 U13 U14 U15 U16
differential pair USB_D: +USB_D_P -USB_D_N
differential pair CSI_TX_D1: +CSI_TX_D1_P -CSI_TX_D1_N
differential pair CSI_TX_D0: +CSI_TX_D0_P -CSI_TX_D0_N
differential pair CSI_TX_CLK: +CSI_TX_CLK_P -CSI_TX_CLK_N
differential pair CAM3_CLK: +CAM3_CLK_P -CAM3_CLK_N
differential pair CAM3_1: +CAM3_1_P -CAM3_1_N
differential pair CAM3_0: +CAM3_0_P -CAM3_0_N
differential pair CAM2_CLK: +CAM2_CLK_P -CAM2_CLK_N
differential pair CAM2_1: +CAM2_1_P -CAM2_1_N
differential pair CAM2_0: +CAM2_0_P -CAM2_0_N
differential pair CAM1_CLK: +CAM1_CLK_P -CAM1_CLK_N
differential pair CAM1_1: +CAM1_1_P -CAM1_1_N
differential pair CAM1_0: +CAM1_0_P -CAM1_0_N
differential pair CAM0_CLK: +CAM0_CLK_P -CAM0_CLK_N
differential pair CAM0_1: +CAM0_1_P -CAM0_1_N
differential pair CAM0_0: +CAM0_0_P -CAM0_0_N

## Components (designator, comment, footprint, x,y, rotation, side; value= is the part's Value field where it differs from the comment)
C1 "0.1uF" C0201 55.723,42.977 r180 top
C2 "0.1uF" C0201 51.145,50 r90 bottom
C3 "0.1uF" C0201 57.73,57.121 r180 top
C4 "0.1uF" C0201 53.081,57.125 r0 top
C5 "10uF" C0603 53.539,42.596 r0 top
C6 "4.7uF" C0603 59.977,50.652 r90 bottom
C7 "0.1uF" C0201 60.955,50.241 r90 bottom
C8 "0.1uF" C0402 65.745,46.4 r180 bottom
C9 "0.1uF" C0201 60.992,46.982 r270 bottom
C10 "4.7uF" C0603 59.931,46.336 r270 bottom
C11 "0.1uF" C0201 51.075,52.426 r90 bottom
C12 "0.1uF" C0201 61.945,52.2 r90 bottom
C13 "0.1uF" c0201 60.548,44.054 r270 bottom
C14 "10uF" C0603 53.029,46.061 r0 bottom
C15 "0.1uF" C0201 59.912,34.51 r270 top
C16 "18pF" C0402 62.554,44.982 r0 top
C17 "18pF" C0402 64.745,45 r180 top
C18 "0.1uF" C0201 70.303,6.477 r0 top
C19 "0.1uF" C0201 67.915,7.391 r90 top
C20 "0.1uF" C0201 26.536,31.646 r90 top
C21 "1uF" C0603 70.68,6.449 r180 bottom
C22 "10uF" C0603 68.017,8.026 r270 bottom
C23 "1uF" C0603 70.861,2.921 r270 bottom
C24 "0.1uF" C0201 69.845,2.235 r90 bottom
C25 "0.1uF" C0201 39.145,35 r0 bottom
C26 "10uF" C0402 38.358,38.657 r0 bottom
C27 "0.1uF" C0201 34.542,34.221 r270 bottom
C28 "10uF" C0402 33.63,34.254 r270 bottom
C29 "0.1uF" C0201 40.71,35.386 r0 bottom
C30 "10uF" C0402 40.518,38.61 r0 bottom
C31 "0.1uF" C0201 37.484,35.03 r0 bottom
C32 "10uF" C0402 36.289,38.61 r0 bottom
C33 "0.1uF" C0201 37.41,36.057 r90 bottom
C34 "10uF" C0402 34.328,38.61 r0 bottom
C35 "0.1uF" C0201 35.934,35.03 r180 bottom
C36 "10uF" C0402 32.407,38.61 r0 bottom
C37 "1uF" C0603 7.151,46.196 r90 top
C38 "0.1uF" C0201 5.956,46.842 r270 top
C39 "10uF" C0603 7.342,49.877 r270 top
C40 "0.1uF" C0201 6.145,49.35 r90 top
C41 "1uF" C0603 1.57,44.272 r0 bottom
C42 "0.1uF" C0201 1.24,47.828 r90 bottom
C44 "1uF" C0603 38.553,52.934 r0 bottom
C45 "0.1uF" C0201 39.796,53.221 r180 top
C46 "10uF" C0603 39.522,54.656 r0 bottom
C47 "0.1uF" C0201 41.989,54.661 r0 bottom
C48 "1uF" C0603 38.444,58.101 r0 bottom
C49 "0.1uF" C0201 40.871,58.101 r0 bottom
C52 "10uF" C0603 32.745,28.2 r270 bottom
C53 "10uF" c0603 34.145,28.2 r270 bottom
C54 "0.1uF" C0201 35.831,26.428 r0 bottom
C55 "0.1uF" C0201 36.656,28.914 r0 bottom
C56 "10uF" C0603 32.745,31.6 r90 bottom
C57 "10uF" c0603 34.145,31.6 r90 bottom
C58 "10uF" C0603 51.914,25.281 r90 bottom
C59 "0.1uF" C0201 47.895,26.8 r0 bottom
C60 "0.1uF" C0201 49.345,24.05 r270 bottom
C63 "10nF" RLP-130-A 66.84,16.238 r270 top
C64 "10uF" C0603 51.945,29 r270 bottom
C65 "0.1uF" C0201 47.065,30.586 r180 bottom
C66 "0.1uF" C0201 47.11,31.894 r180 bottom
C67 "0.1uF" C0201 35.98,31.297 r270 bottom
C68 "0.1uF" C0201 37.413,32.901 r0 bottom
C69 "10uF" C0603 28.944,26.194 r0 bottom
C70 "0.1uF" C0201 29.596,25.173 r180 bottom
C71 "10uF" C0603 27.566,23.643 r270 bottom
C72 "0.1uF" C0201 28.655,23.017 r90 bottom
C73 "0.1uF" C0201 60.234,8.457 r0 top
C74 "10uF" C0603 48.145,39 r180 bottom
C75 "0.1uF" C0201 45.51,33.77 r180 bottom
C76 "10nF" RLP-130-A 66.811,12.301 r270 top
C77 "10nF" RLP-130-A 38.728,40.914 r0 top
C78 "0.1uF" C0402 39.655,40.902 r270 top
C79 "20pF" C0402 47.925,41.859 r0 bottom
C80 "20pF" C0402 39.189,46.324 r180 bottom
C81 "20pF" C0402 38.654,44.81 r90 top
C91 "10uF" C0603 34.443,20.178 r0 bottom
C92 "0.1uF" C0201 35.945,22.4 r270 bottom
C93 "0.1uF" C0201 36.705,22.424 r270 bottom
C94 "10uF" C0603 39.745,20 r0 bottom
C95 "0.1uF" C0201 40.594,23.151 r0 bottom
C96 "0.1uF" C0201 40.595,24 r0 bottom
C97 "0.1uF" C0201 60.168,10.998 r0 top
C98 "10uF" C0603 55.039,24.141 r180 top
C99 "0.1uF" C0201 53.81,25.915 r90 top
C100 "0.1uF" C0201 55.572,22.998 r0 top
C101 "1uF" C0603 68.241,25.355 r270 top
C102 "0.1uF" C0201 69.119,24.65 r90 top
C103 "10uF" C0603 67.627,22.446 r0 bottom
C104 "0.1uF" C0201 68.295,22.6 r180 top
C105 "1uF" C0603 73.403,25.46 r270 bottom
C106 "0.1uF" C0201 43.995,24 r180 bottom
C107 "0.1uF" C0201 45.265,23.216 r90 bottom
C108 "10uF" C0603 45.545,20.4 r180 bottom
C109 "1.0uF" C0603 43.269,13.178 r90 bottom
C110 "1.0uF" C0603 47.469,12.978 r90 bottom
C111 "1.0uF" C0603 17.145,47 r0 top
C112 "1.0uF" C0603 17.441,51.504 r0 top
C113 "0.1uF" C0201 40.625,32.872 r270 bottom
C114 "0.1uF" C0201 40.71,31.093 r0 bottom
C115 "0.1uF" C0201 40.565,28.769 r0 bottom
C116 "0.1uF" C0201 42.245,29.424 r180 bottom
C117 "0.1uF" C0201 42.321,31.1 r180 bottom
C118 "0.1uF" C0201 43.071,32.943 r180 bottom
C119 "0.1uF" C0201 40.055,27.234 r90 bottom
C120 "0.1uF" C0201 41.668,28.022 r90 bottom
C121 "10uF-16V-0603SMT" C0603 29.146,34.968 r90 bottom
C122 "10uF-16V-0603SMT" C0603 29.169,34.959 r90 top
C123 "10uF-16V-0603SMT" C0603 30.356,34.982 r90 bottom
C124 "0.1uF" C0201 42.688,31.714 r180 bottom
C125 "10uF-16V-0603SMT" C0603 44.621,30.662 r0 bottom
C126 "0.1uF" C0201 42.321,30.3 r180 bottom
C127 "0.1uF" C0201 39.284,27.22 r90 bottom
C128 "0.1uF" C0201 40.71,31.894 r0 bottom
C129 "0.1uF" C0201 40.855,27.235 r90 bottom
C130 "0.1uF" C0201 40.71,29.798 r0 bottom
C131 "0.1uF" C0201 42.468,28.022 r90 bottom
C132 "0.1uF" C0201 39.568,32.19 r90 bottom
C133 "10uF-16V-0603SMT" C0603 38.68,32.708 r90 bottom
C134 "10uF-16V-0603SMT" C0603 39.267,29.3 r270 bottom
C135 "1uF" C0603 22.887,31.065 r0 top
C136 "1uF" C0603 21.829,21.048 r270 top
C137 "1uF" C0603 22.878,36.786 r0 top
C138 "10uF" C0603 22.878,36.785 r0 bottom
C139 "1uF" C0603 21.829,23.848 r90 top
C140 "10uF" C0603 23.229,23.848 r90 top
C141 "10uF,25V-1206SMT" RLP-134 3.983,29.604 r270 top
C142 "220NF-0402SMT" RLP-130-A 7.271,31.414 r180 top
C143 "220NF-0402SMT" RLP-130-A 7.277,27.756 r180 top
C144 "1000pF-0402SMT" RLP-130-A 10.471,32.912 r90 top
C145 "1000pF-0402SMT" RLP-130-A 10.192,26.283 r270 top
C146 "330pF-0402SMT" RLP-130-A 15.337,30.861 r90 top
C147 "10pF-0402SMT" RLP-130-A 13.864,31.318 r180 top
C148 "10pF-0402SMT" RLP-130-A 14.561,28.137 r270 bottom
C149 "330pF-0402SMT" RLP-130-A 14.561,28.137 r90 top
C150 "22uF,6.3V-0805SMT" RLP-133 9.317,39.7 r90 bottom
C151 "22uF,6.3V-0805SMT" RLP-133 9.317,39.7 r270 top
C152 "22uF,6.3V-0805SMT" RLP-133 9.317,41.859 r270 top
C153 "22uF,6.3V-0805SMT" RLP-133 8.86,20.295 r90 bottom
C154 "22uF,6.3V-0805SMT" RLP-133 8.86,20.295 r270 top
C155 "10uF,25V-1206SMT" RLP-134 33.734,4.13 r0 top
C156 "220NF-0402SMT" RLP-130-A 31.95,7.788 r270 top
C157 "220NF-0402SMT" RLP-130-A 35.633,7.788 r270 top
C158 "1000pF-0402SMT" RLP-130-A 30.35,11.122 r180 top
C159 "1000pF-0402SMT" RLP-130-A 37.145,11 r0 top
C160 "330pF-0402SMT" RLP-130-A 32.545,15.6 r180 top
C161 "10pF-0402SMT" RLP-130-A 32.145,14 r270 top
C162 "10pF-0402SMT" RLP-130-A 35.208,15.054 r0 bottom
C163 "330pF-0402SMT" RLP-130-A 35.226,15.078 r180 top
C164 "10pF-0402SMT" RLP-130-A 29.384,15.783 r90 top
C165 "22uF,6.3V-0805SMT" RLP-133 24.945,9.6 r0 top
C166 "22uF,6.3V-0805SMT" RLP-133 22.745,9.6 r0 top
C167 "10pF-0402SMT" RLP-130-A 38.345,15.4 r90 top
C168 "22uF,6.3V-0805SMT" RLP-133 24.945,9.6 r180 bottom
C169 "22uF,6.3V-0805SMT" RLP-133 43.145,9.4 r0 top
C170 "22uF,6.3V-0805SMT" RLP-133 45.345,9.4 r0 top
C171 "0.1uF" C0201 74.345,25.25 r90 bottom
D1 "LED_GREEN_0603" APT1608 34.692,56.69 r180 top
D2 "ESDR0502N-UDFN6" UDFN6_040 67.834,57.379 r270 top
D3 "LED_GREEN_0603" APT1608 72.734,40.818 r270 top
D4 "LED_GREEN_0603" APT1608 72.734,38.232 r270 top
D5 "LED_GREEN_0603" APT1608 72.734,35.646 r270 top
D6 "LED_GREEN_0603" APT1608 72.734,33.061 r270 top
D17 "LED_RED_0603" APT1608 72.734,27.915 r270 top
D18 "LED_GREEN_0603" APT1608 72.734,30.475 r270 top
D19 "LED_GREEN_0603" APT1608 4.693,56.69 r180 top
D20 "LED_GREEN_0603" APT1608 8.026,56.69 r180 top
D21 "LED_GREEN_0603" APT1608 11.359,56.69 r180 top
D22 "LED_GREEN_0603" APT1608 14.693,56.69 r180 top
D23 "LED_GREEN_0603" APT1608 24.692,56.69 r180 top
D24 "LED_GREEN_0603" APT1608 18.026,56.69 r180 top
D25 "LED_GREEN_0603" APT1608 28.025,56.69 r180 top
D26 "LED_GREEN_0603" APT1608 21.359,56.69 r180 top
D27 "LED_GREEN_0603" APT1608 31.359,56.69 r180 top
D28 "SCHOTTKY/VISHAY-V12P10" V12P10 8.706,3.966 r180 bottom
D29 "1N4448W" 1N4448W 8.363,34.157 r180 top
D30 "1N4448W" 1N4448W 7.844,24.74 r0 top
D31 "DFLS220L" DFLS220L 3.729,32.309 r270 top
D32 "DFLS220L" DFLS220L 3.761,26.918 r270 top
D33 "1N4448W" 1N4448W 29.014,8.605 r270 top
D34 "1N4448W" 1N4448W 38.325,8.626 r90 top
D35 "DFLS220L" DFLS220L 31.042,3.897 r0 top
D36 "DFLS220L" DFLS220L 36.427,3.897 r0 top
F1 "F1251CT-ND" 0154010 7.361,10.439 r180 top
FB1 "MPZ1005S121CT000" FB0402 59.812,9.728 r270 top
FB2 "BLM15AG601SN1D" FP-BLM15-0_05-MFG 6.086,50.961 r90 top
FB3 "BLM15AG601SN1D" FP-BLM15-0_05-MFG 65.502,7.165 r90 top
FB5 "MPZ1005S121CT000" FB0402 42.145,40.2 r90 bottom
FB6 "MPZ1005S121CT000" FB0402 24.429,27.935 r270 top
FB7 "MPZ1005S121CT000" FB0402 26.545,36.375 r90 top
FB8 "MPZ1005S121CT000" FB0402 22.594,27.444 r0 top
FB9 "BLM15AG601SN1D" FP-BLM15-0_05-MFG 43.912,52.472 r270 top
FB10 "BLM15AG601SN1D" FP-BLM15-0_05-MFG 68.925,20.251 r270 top
IC1 "ICM-42688-P" IIM42352 30.645,23.1 r90 bottom
J1 "62130621021" 62130621021 57.984,30.886 r90 top
J2 "DX07S016JA3R1500" FP-DX07S016JA3R1500-MFG 71.145,47.8 r90 top locked
J3 "AXT524124" FP-AXT524124-MFG 3.105,48.822 r270 top locked
J4 "AXT524124" FP-AXT524124-MFG 68.509,3.824 r0 top locked
J5 "AXT524124" FP-AXT524124-MFG 41.585,55.901 r180 top locked
J6 "AXT524124" FP-AXT524124-MFG 71.921,22.86 r90 top locked
J7 "FH12-22S-0.5SH_1__98_" FH1222S05SH198 55.723,5.41 r0 top
J20 "62101421021" 62101421021 33.6,46.888 r90 top
J39 "PJ-002A" PJ_002A_3P 15.545,7.8 r270 top locked
J44 "62000311121" 62000311121 23.945,49.4 r0 top
JP1 "JUMPER" R0603 64.08,54.829 r0 top
JP2 "JUMPER" 0603 63.545,39.8 r180 top
L1 "600ohm 500mA" FB0603 57.547,50.089 r180 bottom
L2 "600ohm 500mA" FB0603 66.884,45.12 r0 bottom
L3 "600ohm 500mA" FB0603 57.547,47 r180 bottom
L4 "220ohm 500mA" FB0402 37.816,40.03 r90 bottom
L5 "220ohm 500mA" FB0402 32.745,35.9 r90 bottom
L6 "220ohm 500mA" FB0402 40.062,40.03 r90 bottom
L7 "220ohm 500mA" FB0402 33.879,40.03 r90 bottom
L8 "220ohm 500mA" FB0402 35.835,40.03 r90 bottom
L9 "220ohm 500mA" FB0402 31.945,40.03 r90 bottom
L14 "4.7uH-SPD62R-472M" SPD62R 3.399,38.176 r0 top
L15 "4.7uH-SPD62R-472M" SPD62R 3.41,21.05 r180 top
L16 "4.7uH-SPD62R-472M" SPD62R 24.995,4 r90 top
L17 "4.7uH-SPD62R-472M" SPD62R 42.294,4 r270 top
P1 "62000311121" 62000311121 68.345,38.8 r270 top
Q1 "2N2222/SOT23" MMBT2222ALT-1 68.858,30.652 r90 top
Q2 "2N2222/SOT23" MMBT2222ALT-1 25.392,56.355 r0 bottom
Q3 "2N2222/SOT23" MMBT2222ALT-1 29.14,56.389 r0 bottom
Q4 "2N2222/SOT23" MMBT2222ALT-1 17.624,56.355 r0 bottom
Q5 "2N2222/SOT23" MMBT2222ALT-1 21.474,56.366 r0 bottom
Q6 "2N2222/SOT23" MMBT2222ALT-1 32.9,56.378 r0 bottom
R1 "4.7K" R0603 56.284,29.594 r180 bottom
R2 "4.7K" R0603 59.934,32.531 r0 bottom
R3 "4.7K" R0603 59.934,30.886 r0 bottom
R4 "2.2K" R0603 56.284,32.356 r0 bottom
R5 "33" R0402 61.799,54.409 r270 bottom
R6 "0" R0603 60.553,54.755 r270 bottom
R7 "0" R0603 59.182,54.755 r270 bottom
R8 "0" R0603 57.851,54.755 r270 bottom
R9 "2.2K" R0603 64.08,52.807 r0 top
R10 "10K" R0603 60.183,40.838 r90 bottom
R11 "10K" R0603 58.786,40.838 r90 bottom
R12 "10K" R0603 56.637,40.056 r180 bottom
R13 "12K" R0603 59.152,48.514 r0 bottom
R14 "2K" R0402 36.089,56.055 r90 top
R15 "0" R0603 47.67,52.183 r180 top
R16 "12K" R0603 56.627,41.6 r180 bottom
R17 "0" R0603 47.67,50.786 r180 top
R18 "4.7K" RLP-101 47.67,47.991 r270 top
R19 "4.7K" RLP-101 47.67,54.976 r270 top
R20 "0" R0603 47.67,53.58 r180 top
R21 "0" R0603 47.67,49.389 r180 top
R22 "0" R0603 47.67,49.388 r180 bottom
R23 "100k" R0402 26.593,30.011 r90 top
R24 "22" R0402 31.814,30.738 r270 top
R25 "4.7k" R0402 4.13,46.178 r180 bottom
R26 "4.7k" R0402 4.142,47.01 r180 bottom
R27 "100 ohm" R0201 31.999,36.22 r270 top
R28 "100 ohm" R0201 34.25,36.214 r180 bottom
R29 "100 ohm" R0201 35.581,36.826 r270 bottom
R30 "100 ohm" R0201 42.312,23.241 r0 bottom
R31 "100 ohm" R0201 43.794,22.409 r180 bottom
R32 "4.7k" R0402 73.852,4.394 r270 bottom
R33 "4.7k" R0402 72.945,4.4 r270 bottom
R34 "33" R0201 35.545,29.2 r90 bottom
R35 "33" R0201 36.349,28.215 r180 bottom
R36 "4.7k" R0402 67.026,7.302 r90 top
R37 "100 ohm" R0201 39.115,36.057 r270 bottom
R38 "100 ohm" R0201 42.134,19.558 r0 top
R39 "100 ohm" R0201 38.836,37.803 r180 bottom
R40 "100 ohm" R0201 40.495,36.872 r270 bottom
R41 "100 ohm" R0201 45.745,21.6 r0 bottom
R42 "100 ohm" R0201 46.472,23.319 r270 bottom
R43 "4.7k" R0402 36.145,53.6 r90 top
R44 "4.7k" R0402 37.145,53.6 r90 top
R45 "4.7k" R0402 72.297,26.23 r270 bottom
R46 "4.7k" R0402 71.187,26.205 r270 bottom
R47 "33" R0201 37.845,29.018 r90 bottom
R48 "33" R0201 38.202,27.573 r180 bottom
R51 "4.7k" R0402 68.372,21.682 r180 top
R52 "100 ohm" R0201 43.932,25.572 r0 bottom
R53 "4.7K" R0402 57.672,9.407 r0 top
R54 "4.7K" R0402 55.745,9.4 r180 top
R55 "5K1" FP-CR0402-IPC_A 70.345,46.08 r0 bottom
R56 "5K1" FP-CR0402-IPC_A 70.345,49 r0 bottom
R57 "10K" R0402 29.345,21 r0 bottom
R58 "33 ohm" R0402 56.104,14.046 r180 top
R59 "33 ohm" R0402 58.545,13.8 r270 top
R60 "33 ohm" R0402 59.138,23.667 r90 top
R61 "33 ohm" R0402 57.232,23.658 r90 top
R62 "33 ohm" RLP-100 53.896,27.671 r180 top
R63 "33 ohm" R0402 59.357,26.223 r270 top
R64 "0" R0201 43.868,28.062 r90 bottom
R65 "0" R0201 45.871,27.096 r0 bottom
R66 "0" R0201 45.545,25.6 r180 bottom
R67 "0" R0201 45.258,24.338 r270 bottom
R68 "0" R0201 47.66,23.537 r0 bottom
R69 "10k" R0402 66.843,17.157 r0 top
R70 "0" R0201 48.019,24.528 r0 bottom
R72 "100" R0402 68.262,16.695 r270 top
R73 "0" R0402 51.989,33.604 r180 top
R74 "0" R0402 51.989,32.664 r180 top
R75 "1k" R0402 51.989,34.569 r0 top
R76 "10k" R0402 64.883,30.339 r270 top
R77 "100" R0402 66.813,13.172 r0 top
R78 "33" R0402 41.949,34.446 r270 bottom
R79 "2.0k" R0402 73.346,29.184 r180 top
R80 "100" R0402 68.259,12.682 r270 top
R81 "2.0k" R0402 65.912,30.35 r90 top
R82 "10k" R0402 65.939,32.542 r90 top
R83 "10k" R0402 67.345,33 r180 top
R84 "4.7k" R0402 46.047,42.377 r180 bottom
R85 "4.7k" R0402 46.071,45.136 r180 bottom
R86 "1k" R0402 39.545,44.8 r90 top
R87 "4.7k" R0402 39.647,42.734 r270 top
R88 "0" R0402 46.065,41.436 r0 bottom
R89 "0" R0402 46.122,43.256 r0 bottom
R90 "0" R0402 38.789,42.74 r90 top
R91 "0" R0402 46.071,44.196 r180 bottom
R92 "0" R0402 39.179,45.477 r0 bottom
R113 "15k" RLP-103 5.442,55.637 r270 bottom
R114 "4.7k" R0402 9.33,56.055 r90 top
R115 "2.0k" R0402 12.688,56.055 r90 top
R116 "1.0k" R0402 46.269,13.378 r270 bottom
R117 "2.0k" R0402 26.009,56.055 r90 top
R118 "2.0k" R0402 19.376,56.055 r90 top
R119 "2.0k" R0402 29.386,56.055 r90 top
R120 "2.0k" R0402 17.922,50.197 r180 top
R121 "1.5k" R0402 15.997,56.055 r90 top
R122 "2.2k" R0402 30.08,53.489 r270 bottom
R123 "2.2k" R0402 26.334,53.505 r270 bottom
R124 "4.7k" R0402 18.605,53.5 r270 bottom
R125 "2.0k" R0402 22.883,56.055 r90 top
R126 "2.0k" R0402 32.679,56.055 r90 top
R127 "0.1" 0603 24.745,47 r0 bottom
R128 "0.1" 0603 59.977,28.062 r180 bottom
R129 "0.1" 0603 59.945,26.2 r180 bottom
R130 "0.1" 0603 31.695,25.451 r0 top
R131 "0.1" 0603 31.11,31.656 r90 bottom
R132 "4.7k" R0402 22.422,53.487 r270 bottom
R133 "2.2k" R0402 33.854,53.492 r270 bottom
R134 "0.1" 0603 44.774,18.143 r90 bottom
R135 "0.1" 0603 40.545,18 r90 bottom
R136 "0.1" 0603 35.945,18.8 r180 bottom
R137 "0.1" 0603 43.545,39 r90 bottom
R138 "0.1" 0603 28.149,27.476 r180 top
R140 "10k" R0402 22.945,32.4 r0 top
R141 "1k" R0402 22.878,35.592 r180 top
R142 "10k" R0402 17.072,21.193 r90 top
R143 "1.15K-0603SMT" RLP-101 20.629,26.048 r90 top
R144 "1k" R0402 24.429,24.048 r270 top
R145 "0" R0402 21.296,33.245 r90 top
R146 "0" R0603 18.092,21.685 r90 top
R147 "0" R0603 19.182,19.559 r180 top
R148 "909-0603SMT" RLP-101 18.829,24.848 r90 top
R149 "0" R0603 27.117,34.182 r0 top
R150 "0" R0603 22.887,29.741 r0 top
R151 "51K-0402SMT" RLP-100 14.561,29.077 r270 top
R153 "0.1" 0603 7.869,17.704 r90 top
R154 "1.05K-0603SMT" RLP-101 13.57,33.928 r0 top
R155 "1.07K-0603SMT" RLP-101 13.316,25.267 r180 top
R156 "200 -0603SMT" RLP-101 12.148,33.928 r180 top
R157 "51K-0402SMT" RLP-100 15.337,31.877 r270 top
R158 "34K-0402SMT" RLP-100 16.491,28.823 r180 bottom
R159 "51K-0402SMT" RLP-100 14.561,27.197 r270 top
R160 "340-0603SMT" RLP-101 11.869,25.267 r0 top
R161 "51K-0402SMT" RLP-100 34.287,15.078 r0 top
R164 "200-0603SMT" RLP-101 29.384,14.564 r90 top
R165 "1.15K-0603SMT" RLP-101 37.945,14.2 r270 top
R166 "30_1K-0402SMT" RLP-100 31.545,15.6 r0 top
R167 "63_4K-0402SMT" RLP-100 34.49,16.977 r270 bottom
R168 "20K-0402SMT" RLP-100 36.115,15.078 r0 top
R169 "768-0603SMT" RLP-101 29.385,13.141 r270 top
R170 "909-0603SMT" RLP-101 37.945,12.8 r90 top
R172 "10K" R0603 56.057,52.255 r90 bottom
R173 "1.0 K" R0603 56.052,55.053 r270 bottom
R174 "2K" R0402 73.346,39.522 r180 top
R175 "2K" R0402 73.346,36.982 r180 top
R176 "2K" R0402 73.346,34.348 r180 top
R177 "2K" R0402 73.346,31.8 r180 top
SW4 "GSRN" 4PSMD_SWITCH 71.396,16.877 r180 top
SW5 "PROGRAMN" 4PSMD_SWITCH 71.32,13.144 r180 top
TP1 "TP_S_40_63" TP_1MM 53.285,31.623 r0 top
TP2 "TP_S_40_63" TP_1MM 45.717,49.346 r0 top
TP7 "TestPoint" TP_1MM 68.297,15.176 r0 top
TP9 "TestPoint" TP_1MM 51.745,27.8 r0 top
TP10 "TestPoint" TP_1MM 29.633,45.717 r270 top
TP12 "TestPoint" TP_1MM 29.64,44.247 r270 top
TP_V1P0_LDO "TP_S_40_63" TP_1MM 27.81,37.017 r90 top
TP_V1P2 "TP_S_40_63" TP_1MM 47.545,15.2 r90 bottom
TP_V1P8 "TP_S_40_63" TP_1MM 48.145,8.4 r180 top
TP_V1P8_LDO "TP_S_40_63" TP_1MM 25.545,26 r180 top
TP_V2P8 "TP_S_40_63" TP_1MM 19.745,49.399 r90 top
TP_V3P3 "TP_S_40_63" TP_1MM 14.962,22.507 r0 top
TP_V5P0 "TP_S_40_63" TP_1MM 8.437,43.593 r180 top
TP_VCC_CORE_V1P0 "TP_S_40_63" TP_1MM 28.145,32.8 r0 top
TP_VCCIO0 "TP_S_40_63" TP_1MM 29.624,48.091 r180 top
TP_VCCIO1 "TP_S_40_63" TP_1MM 64.745,17.2 r180 bottom
TP_VCCIO2 "TP_S_40_63" TP_1MM 59.198,24.431 r180 bottom
TP_VCCIO3 "TP_S_40_63" TP_1MM 46.577,18.91 r180 bottom
TP_VCCIO4 "TP_S_40_63" TP_1MM 41.924,18.241 r180 bottom
TP_VCCIO5 "TP_S_40_63" TP_1MM 34.223,18.854 r0 top
TP_VCCIO6 "TP_S_40_63" TP_1MM 25.553,30.393 r270 top
TP_VCCIO7 "TP_S_40_63" TP_1MM 29.529,32.531 r270 bottom
U1 "FT2232HL" TQFP64_0P5_12P2X12P2_H1P6 55.976,50.049 r180 top locked
U2 "93LC56C-I/SN" SO8_50_244 57.998,38.806 r270 top
U3 "LIFCL-40-BG400" LIFCL-40-BG400 41.915,29.24 r0 top locked
U5 "SN74LVC125APWR" FP-PW0014A-IPC_B 57.223,18.646 r90 top
U6 "MX25L12833FM2I-10G" SO8_MX25L12833FM2I10G 44.58,43.58 r180 top locked
U9 "SN74LVC2G125DCUR" FP-DCU0008A-MFG 56.512,26.427 r180 top
U11 "NCP110AMX120TBG" 4XDFN_NCP110 44.861,13.405 r270 bottom
U12 "NCP110AMX280TBG" 4XDFN_NCP110 17.927,48.513 r180 top
U13 "BD00IC0WHFV-GTR" 6HVSOF_BD00IC0WHFV 19.995,22.416 r270 top
U14 "TLV73310PDQNT" 4X2SON 22.913,34.088 r270 top
U15 "LT3508EUF" LT3508EUF 10.421,29.61 r270 top
U16 "LT3508EUF" LT3508EUF 33.753,10.937 r0 top
X1 "7M-12.000MAAJ" XTAL_4P_7M 63.545,42.75 r0 top
X2 "ASE3-27.000MHz-K-T" 27MHZ 29.258,30.398 r90 top

## Footprints (in the part's own frame and the unit in brackets; to place one, negate y for a bottom-side part, rotate by r counter-clockwise, add the part's x,y. Pads: shape width x height; smd on the part's side, far side on the other; paste and mask are expansions set on the pad)
1N4448W [mm] "1N4448W"
  rect 0.5x1.3 smd: 1(0,1.2) 2(0,-1.2)
  silkscreen extent -0.97,-1.65 0.97,1.65, body extent -0.77,-1.86 0.77,1.86, height 1.35
4PSMD_SWITCH [mm] "4PSMD_SWITCH"
  rect 1.15x1.05 smd: 1(-1.675,0.725) 2(-1.675,-0.725) 3(1.675,0.725) 4(1.675,-0.725)
  silkscreen extent -2,-1.7 2,2.36, body extent -2.15,-1.45 2.15,1.45, height 1.7
4X2SON [mm] "4X2SON"
  rect 0.25x0.31 smd paste-0.142 mask+0: 1(-0.535,0.325) 2(-0.535,-0.325) 3(0.535,-0.325) 4(0.535,0.325)
  rect 0.48x0.48 smd rot 45 paste-0.065 mask+0: 5(0,0)
  TOP region: -0.66,0.17 -0.66,0.48 -0.2,0.48 -0.2,0.379 -0.409,0.17
  TOP region: 0.66,0.17 0.66,0.48 0.2,0.48 0.2,0.379 0.409,0.17
  TOP region: 0.66,-0.17 0.66,-0.48 0.2,-0.48 0.2,-0.379 0.409,-0.17
  TOP region: -0.66,-0.17 -0.66,-0.48 -0.2,-0.48 -0.2,-0.379 -0.409,-0.17
  silkscreen extent -0.88,-0.7 0.88,0.7
4XDFN_NCP110 [mil] "4XDFN_NCP110"
  round 1 smd: 1(-12.8,-15.94) 2(12.8,-15.94) 3(12.8,15.94) 4(-12.8,15.94) 5(0,0)
  TOP region: 7.68,23.62 17.92,23.62 17.92,8.26 13.59,8.26 7.68,14.47
  TOP region: -17.92,23.62 -7.68,23.62 -7.68,14.47 -13.59,8.26 -17.92,8.26
  TOP region: 14.47,0 0,14.47 -14.47,0 0,-14.47
  TOP region: 17.92,-23.62 7.68,-23.62 7.68,-14.47 13.59,-8.26 17.92,-8.26
  TOP region: -7.68,-23.62 -17.92,-23.62 -17.92,-8.26 -13.59,-8.26 -7.68,-14.47
  silkscreen extent -34,-48 30,30, body extent -20,-20 20,20, height 13
6HVSOF_BD00IC0WHFV [mm] "6HVSOF_BD00IC0WHFV"
  rect 0.55x0.25 smd: 1(-1.375,0.5) 2(-1.375,0) 3(-1.375,-0.5) 4(1.375,-0.5) 5(1.375,0) 6(1.375,0.5)
  rect 1.6x1.9 smd: 7(0,0)
  silkscreen extent -2.25,-1.15 1.65,1.16, body extent -1.53,-0.85 1.57,0.85, height 0.76
27MHZ [mm] "27MHZ"
  rect 1x1.2 smd: 1(-0.825,1.27) 2(-0.825,-1.27) 3(0.825,-1.27) 4(0.825,1.27)
  silkscreen extent -2.24,-1.95 1.6,1.95, body extent -1.26,-1.61 1.26,1.61, height 0.9
0603 [mm] "0603"
  rect 0.92x0.97 smd: 1(-0.775,0) 2(0.775,0)
  silkscreen extent -1.13,-0.73 1.13,0.73, body extent -0.8,-0.42 0.8,0.38, height 0.45
0154010 [mm] "0154010"
  rect 3.81x4.24 smd: 1(0,3.19) 2(0,-3.19)
  silkscreen extent -2.5,-6 2.5,6, body extent -2.51,-4.86 2.51,4.86, height 3.81
62000311121 [mm] "Pin Header, pitch 2.00 mm, THT, Vertical, single row, 3p"
  rrect50% 1.4x1.4 hole 0.9: 1(-2,0)
  round 1.4 hole 0.9: 2(0,0) 3(2,0)
  silkscreen extent -3.77,-1.07 3.2,1.07, body extent -3,-1 3,1, height 6.05
62101421021 [mm] "Pin Header, pitch 1.27 mm, SMD, Vertical, dual row, 14p"
  rect 0.76x2.4 smd: 1(-3.81,-1.85) 2(-3.81,1.85) 3(-2.54,-1.85) 4(-2.54,1.85) 5(-1.27,-1.85) 6(-1.27,1.85) 7(0,-1.85) 8(0,1.85) 9(1.27,-1.85) 10(1.27,1.85) 11(2.54,-1.85) 12(2.54,1.85) 13(3.81,-1.85) 14(3.81,1.85)
  silkscreen extent -4.62,-3.63 4.62,1.8, body extent -4.44,-2.5 4.45,2.5, height 5.9
62130621021 [mm] "Pin Header, pitch 1.27 mm, SMD, Vertical, dual row, 6p"
  rect 0.75x2.4 smd: 1(-1.27,-1.95) 2(-1.27,1.95) 3(0,-1.95) 4(0,1.95) 5(1.27,-1.95) 6(1.27,1.95)
  silkscreen extent -2.51,-2.02 -2.26,-1.78, body extent -1.91,-2.55 1.9,2.55, height 5.9
APT1608 [mil] "APT1608"
  rect 31.5x31.5 smd: 1(0,-32.5) 2(0,32.5)
  silkscreen extent -30,-59 30,59, body extent -25,-39 25,39, height 16
C0201 [mm] "C0201"
  rect 0.45x0.4 smd: 1(-0.35,0) 2(0.35,0)
  silkscreen extent 0,-0.2 0,0.2, body extent -0.32,-0.16 0.31,0.17, height 0.34
c0201 [mm] "C0201"
  rect 0.45x0.4 smd: 1(-0.35,0) 2(0.35,0)
  silkscreen extent 0,-0.2 0,0.2, body extent -0.32,-0.16 0.31,0.17, height 0.34
C0402 [mm] "C0402"
  rect 0.65x0.65 smd: 1(-0.45,0) 2(0.45,0)
  silkscreen extent 0,-0.38 0,0.38, body extent -0.5,-0.26 0.5,0.26, height 0.52
C0603 [mm] "C0603"
  rect 0.95x1 smd: 1(0.8,0) 2(-0.8,0)
  silkscreen extent 0,-0.5 0,0.5, body extent -0.8,-0.41 0.8,0.41, height 0.82
c0603 [mm] "C0603"
  rect 0.95x1 smd: 1(0.8,0) 2(-0.8,0)
  silkscreen extent 0,-0.5 0,0.5, body extent -0.8,-0.41 0.8,0.41, height 0.82
DFLS220L [mm] "DFLS220L"
  rect 1.4x2.2 smd: 1(0,0.95)
  rect 1.4x0.9 smd: 2(0,-1.6)
  silkscreen extent -1,-2.75 1,2.75, body extent -0.91,-1.93 0.89,1.93, height 1.35
FB0402 [mm] "FB0402"
  rect 0.55x0.55 smd: 1(-0.5,0) 2(0.5,0)
  silkscreen extent -0.78,-0.53 0.78,0.53, body extent -0.5,-0.26 0.5,0.26, height 0.52
FB0603 [mm] "FB0603"
  rect 0.95x1 smd: 1(-0.825,-0.013) 2(0.825,-0.013)
  silkscreen extent -1.55,-0.76 1.55,0.74, body extent -0.8,-0.41 0.8,0.41, height 0.82
FH1222S05SH198 [mm]
  rect 0.3x1.3 smd: 1(-5.25,1.625) 2(-4.75,1.625) 3(-4.25,1.625) 4(-3.75,1.625) 5(-3.25,1.625) 6(-2.75,1.625) 7(-2.25,1.625) 8(-1.75,1.625) 9(-1.25,1.625) 10(-0.75,1.625) 11(-0.25,1.625) 12(0.25,1.625) 13(0.75,1.625) 14(1.25,1.625) 15(1.75,1.625) 16(2.25,1.625) 17(2.75,1.625) 18(3.25,1.625) 19(3.75,1.625) 20(4.25,1.625) 21(4.75,1.625) 22(5.25,1.625)
  rect 1.8x2.2 smd: MP1(-7.15,-1.625) MP2(7.15,-1.625)
  silkscreen extent -7.05,-4.62 7.05,2.7, body extent -7.55,-4.57 7.55,1.83, height 2.15
FP-AXT524124-MFG [mm]
  rect 0.23x0.92 smd paste-1000 mask+0: 1(2.2,-1.64) 2(1.8,-1.64) 3(1.4,-1.64) 4(1,-1.64) 5(0.6,-1.64) 6(0.2,-1.64) 7(-0.2,-1.64) 8(-0.6,-1.64) 9(-1,-1.64) 10(-1.4,-1.64) 11(-1.8,-1.64) 12(-2.2,-1.64) 13(-2.2,1.64) 14(-1.8,1.64) 15(-1.4,1.64) 16(-1,1.64) 17(-0.6,1.64) 18(-0.2,1.64) 19(0.2,1.64) 20(0.6,1.64) 21(1,1.64) 22(1.4,1.64) 23(1.8,1.64) 24(2.2,1.64)
  rect 0.7x1.2 smd paste+0 mask+0: 25(3.1,1.5) 26(-3.1,1.5) 27(3.1,-1.5) 28(-3.1,-1.5)
  silkscreen extent -3.75,-2.78 3.75,0.53, body extent -3.85,-2.2 3.85,2.2, height 0.25
FP-BLM15-0_05-MFG [mm]
  rect 0.4x0.5 smd paste+0 mask+0: 1(-0.4,0) 2(0.4,0)
  silkscreen extent -0.53,-0.63 0.52,0.63, body extent -0.7,-0.38 0.7,0.38, height 0.25
FP-CR0402-IPC_A [mm]
  rect 0.715x0.672 smd paste+0 mask+0: 1(-0.479,0) 2(0.479,0)
  silkscreen extent -0.84,-0.74 0.84,0.74, body extent -0.5,-0.25 0.5,0.25, height 0.4
FP-DCU0008A-MFG [mm]
  rect 0.8x0.3 smd paste-1000 mask+0: 1(-1.55,0.75) 2(-1.55,0.25) 3(-1.55,-0.25) 4(-1.55,-0.75) 5(1.55,-0.75) 6(1.55,-0.25) 7(1.55,0.25) 8(1.55,0.75)
  silkscreen extent -2.63,-1.05 0.78,1.05, body extent -1.55,-1 1.55,1, height 0.9
FP-DX07S016JA3R1500-MFG [mm]
  rrect100% 1.3x2.3 hole 1.6 slot 0.6 at 0 deg paste-2539.97 mask+0: 1(-4.32,2.675) 2(4.32,2.675)
  rrect100% 1.3x2.6 hole 1.9 slot 0.6 at 0 deg paste-2539.97 mask+0: 3(-4.32,-1.15) 6(4.32,-1.15)
  rect 1x2 smd paste+0 mask+0: 4(-1.4,-1.15) 5(1.4,-1.15)
  rect 0.52x1 smd paste+0 mask+0: A1/B12(-3.1,3.05) A4/B9(-2.35,3.05) A12/B1(3.1,3.05) B4/A9(2.35,3.05)
  rect 0.27x1 smd paste+0 mask+0: A5(-1.75,3.05) A6(-0.25,3.05) A7(0.75,3.05) A8(1.75,3.05) B5(1.25,3.05) B6(0.25,3.05) B7(-0.75,3.05) B8(-1.25,3.05)
  round 0.6 hole 0.6 unplated paste-2539.97 mask+0: ""(-3,1.95)
  rrect100% 0.85x0.6 hole 0.6 slot 0.85 at 0 deg unplated paste-2539.97 mask+0: ""(3,1.95)
  silkscreen extent -4.52,4.2 4.52,4.8, body extent -5.07,-3.9 5.07,3.92, height 0.25
FP-PW0014A-IPC_B [mm]
  rect 1.655x0.381 smd paste+0 mask+0: 1(-2.825,1.95)
  rrect100% 1.655x0.381 smd paste+0 mask+0: 2(-2.825,1.3) 3(-2.825,0.65) 4(-2.825,0) 5(-2.825,-0.65) 6(-2.825,-1.3) 7(-2.825,-1.95) 8(2.825,-1.95) 9(2.825,-1.3) 10(2.825,-0.65) 11(2.825,0) 12(2.825,0.65) 13(2.825,1.3) 14(2.825,1.95)
  silkscreen extent -4.37,-2.5 1.5,2.5, body extent -3.17,-2.5 3.23,2.5, height 1.2
IIM42352 [mm]
  rect 0.6x0.3 smd: 1(-1.15,0.75) 2(-1.15,0.25) 3(-1.15,-0.25) 4(-1.15,-0.75) 8(1.15,-0.75) 9(1.15,-0.25) 10(1.15,0.25) 11(1.15,0.75)
  rect 0.3x0.6 smd: 5(-0.5,-0.9) 6(0,-0.9) 7(0.5,-0.9) 12(0.5,0.9) 13(0,0.9) 14(-0.5,0.9)
  silkscreen extent -1.95,-1.25 1.5,1.25, body extent -1.5,-1.25 1.5,1.25, height 0.9
LIFCL-40-BG400 [mm] "LIFCL-40-BG400"
  round 0.4 smd: A1(-7.6,7.6) A2(-6.8,7.6) A3(-6,7.6) A4(-5.2,7.6) A5(-4.4,7.6) A6(-3.6,7.6) A7(-2.8,7.6) A8(-2,7.6) A9(-1.2,7.6) A10(-0.4,7.6) A11(0.4,7.6) A12(1.2,7.6) A13(2,7.6) A14(2.8,7.6) A15(3.6,7.6) A16(4.4,7.6) A17(5.2,7.6) A18(6,7.6) A19(6.8,7.6) A20(7.6,7.6) B1(-7.6,6.8) B2(-6.8,6.8) B3(-6,6.8) B4(-5.2,6.8) B5(-4.4,6.8) B6(-3.6,6.8) B7(-2.8,6.8) B8(-2,6.8) B9(-1.2,6.8) B10(-0.4,6.8) B11(0.4,6.8) B12(1.2,6.8) B13(2,6.8) B14(2.8,6.8) B15(3.6,6.8) B16(4.4,6.8) B17(5.2,6.8) B18(6,6.8) B19(6.8,6.8) B20(7.6,6.8) C1(-7.6,6) C2(-6.8,6) C3(-6,6) C4(-5.2,6) C5(-4.4,6) C6(-3.6,6) C7(-2.8,6) C8(-2,6) C9(-1.2,6) C10(-0.4,6) C11(0.4,6) C12(1.2,6) C13(2,6) C14(2.8,6) C15(3.6,6) C16(4.4,6) C17(5.2,6) C18(6,6) C19(6.8,6) C20(7.6,6) D1(-7.6,5.2) D2(-6.8,5.2) D3(-6,5.2) D4(-5.2,5.2) D5(-4.4,5.2) D6(-3.6,5.2) D7(-2.8,5.2) D8(-2,5.2) D9(-1.2,5.2) D10(-0.4,5.2) D11(0.4,5.2) D12(1.2,5.2) D13(2,5.2) D14(2.8,5.2) D15(3.6,5.2) D16(4.4,5.2) D17(5.2,5.2) D18(6,5.2) D19(6.8,5.2) D20(7.6,5.2) E1(-7.6,4.4) E2(-6.8,4.4) E3(-6,4.4) E4(-5.2,4.4) E5(-4.4,4.4) E6(-3.6,4.4) E7(-2.8,4.4) E8(-2,4.4) E9(-1.2,4.4) E10(-0.4,4.4) E11(0.4,4.4) E12(1.2,4.4) E13(2,4.4) E14(2.8,4.4) E15(3.6,4.4) E16(4.4,4.4) E17(5.2,4.4) E18(6,4.4) E19(6.8,4.4) E20(7.6,4.4) F1(-7.6,3.6) F2(-6.8,3.6) F3(-6,3.6) F4(-5.2,3.6) F5(-4.4,3.6) F6(-3.6,3.6) F7(-2.8,3.6) F8(-2,3.6) F9(-1.2,3.6) F10(-0.4,3.6) F11(0.4,3.6) F12(1.2,3.6) F13(2,3.6) F14(2.8,3.6) F15(3.6,3.6) F16(4.4,3.6) F17(5.2,3.6) F18(6,3.6) F19(6.8,3.6) F20(7.6,3.6) G1(-7.6,2.8) G2(-6.8,2.8) G3(-6,2.8) G4(-5.2,2.8) G5(-4.4,2.8) G6(-3.6,2.8) G7(-2.8,2.8) G8(-2,2.8) G9(-1.2,2.8) G10(-0.4,2.8) G11(0.4,2.8) G12(1.2,2.8) G13(2,2.8) G14(2.8,2.8) G15(3.6,2.8) G16(4.4,2.8) G17(5.2,2.8) G18(6,2.8) G19(6.8,2.8) G20(7.6,2.8) H1(-7.6,2) H2(-6.8,2) H3(-6,2) H4(-5.2,2) H5(-4.4,2) H6(-3.6,2) H7(-2.8,2) H8(-2,2) H9(-1.2,2) H10(-0.4,2) H11(0.4,2) H12(1.2,2) H13(2,2) H14(2.8,2) H15(3.6,2) H16(4.4,2) H17(5.2,2) H18(6,2) H19(6.8,2) H20(7.6,2) J1(-7.6,1.2) J2(-6.8,1.2) J3(-6,1.2) J4(-5.2,1.2) J5(-4.4,1.2) J6(-3.6,1.2) J7(-2.8,1.2) J8(-2,1.2) J9(-1.2,1.2) J10(-0.4,1.2) J11(0.4,1.2) J12(1.2,1.2) J13(2,1.2) J14(2.8,1.2) J15(3.6,1.2) J16(4.4,1.2) J17(5.2,1.2) J18(6,1.2) J19(6.8,1.2) J20(7.6,1.2) K1(-7.6,0.4) K2(-6.8,0.4) K3(-6,0.4) K4(-5.2,0.4) K5(-4.4,0.4) K6(-3.6,0.4) K7(-2.8,0.4) K8(-2,0.4) K9(-1.2,0.4) K10(-0.4,0.4) K11(0.4,0.4) K12(1.2,0.4) K13(2,0.4) K14(2.8,0.4) K15(3.6,0.4) K16(4.4,0.4) K17(5.2,0.4) K18(6,0.4) K19(6.8,0.4) K20(7.6,0.4) L1(-7.6,-0.4) L2(-6.8,-0.4) L3(-6,-0.4) L4(-5.2,-0.4) L5(-4.4,-0.4) L6(-3.6,-0.4) L7(-2.8,-0.4) L8(-2,-0.4) L9(-1.2,-0.4) L10(-0.4,-0.4) L11(0.4,-0.4) L12(1.2,-0.4) L13(2,-0.4) L14(2.8,-0.4) L15(3.6,-0.4) L16(4.4,-0.4) L17(5.2,-0.4) L18(6,-0.4) L19(6.8,-0.4) L20(7.6,-0.4) M1(-7.6,-1.2) M2(-6.8,-1.2) M3(-6,-1.2) M4(-5.2,-1.2) M5(-4.4,-1.2) M6(-3.6,-1.2) M7(-2.8,-1.2) M8(-2,-1.2) M9(-1.2,-1.2) M10(-0.4,-1.2) M11(0.4,-1.2) M12(1.2,-1.2) M13(2,-1.2) M14(2.8,-1.2) M15(3.6,-1.2) M16(4.4,-1.2) M17(5.2,-1.2) M18(6,-1.2) M19(6.8,-1.2) M20(7.6,-1.2) N1(-7.6,-2) N2(-6.8,-2) N3(-6,-2) N4(-5.2,-2) N5(-4.4,-2) N6(-3.6,-2) N7(-2.8,-2) N8(-2,-2) N9(-1.2,-2) N10(-0.4,-2) N11(0.4,-2) N12(1.2,-2) N13(2,-2) N14(2.8,-2) N15(3.6,-2) N16(4.4,-2) N17(5.2,-2) N18(6,-2) N19(6.8,-2) N20(7.6,-2) P1(-7.6,-2.8) P2(-6.8,-2.8) P3(-6,-2.8) P4(-5.2,-2.8) P5(-4.4,-2.8) P6(-3.6,-2.8) P7(-2.8,-2.8) P8(-2,-2.8) P9(-1.2,-2.8) P10(-0.4,-2.8) P11(0.4,-2.8) P12(1.2,-2.8) P13(2,-2.8) P14(2.8,-2.8) P15(3.6,-2.8) P16(4.4,-2.8) P17(5.2,-2.8) P18(6,-2.8) P19(6.8,-2.8) P20(7.6,-2.8) R1(-7.6,-3.6) R2(-6.8,-3.6) R3(-6,-3.6) R4(-5.2,-3.6) R5(-4.4,-3.6) R6(-3.6,-3.6) R7(-2.8,-3.6) R8(-2,-3.6) R9(-1.2,-3.6) R10(-0.4,-3.6) R11(0.4,-3.6) R12(1.2,-3.6) R13(2,-3.6) R14(2.8,-3.6) R15(3.6,-3.6) R16(4.4,-3.6) R17(5.2,-3.6) R18(6,-3.6) R19(6.8,-3.6) R20(7.6,-3.6) T1(-7.6,-4.4) T2(-6.8,-4.4) T3(-6,-4.4) T4(-5.2,-4.4) T5(-4.4,-4.4) T6(-3.6,-4.4) T7(-2.8,-4.4) T8(-2,-4.4) T9(-1.2,-4.4) T10(-0.4,-4.4) T11(0.4,-4.4) T12(1.2,-4.4) T13(2,-4.4) T14(2.8,-4.4) T15(3.6,-4.4) T16(4.4,-4.4) T17(5.2,-4.4) T18(6,-4.4) T19(6.8,-4.4) T20(7.6,-4.4) U1(-7.6,-5.2) U2(-6.8,-5.2) U3(-6,-5.2) U4(-5.2,-5.2) U5(-4.4,-5.2) U6(-3.6,-5.2) U7(-2.8,-5.2) U8(-2,-5.2) U9(-1.2,-5.2) U10(-0.4,-5.2) U11(0.4,-5.2) U12(1.2,-5.2) U13(2,-5.2) U14(2.8,-5.2) U15(3.6,-5.2) U16(4.4,-5.2) U17(5.2,-5.2) U18(6,-5.2) U19(6.8,-5.2) U20(7.6,-5.2) V1(-7.6,-6) V2(-6.8,-6) V3(-6,-6) V4(-5.2,-6) V5(-4.4,-6) V6(-3.6,-6) V7(-2.8,-6) V8(-2,-6) V9(-1.2,-6) V10(-0.4,-6) V11(0.4,-6) V12(1.2,-6) V13(2,-6) V14(2.8,-6) V15(3.6,-6) V16(4.4,-6) V17(5.2,-6) V18(6,-6) V19(6.8,-6) V20(7.6,-6) W1(-7.6,-6.8) W2(-6.8,-6.8) W3(-6,-6.8) W4(-5.2,-6.8) W5(-4.4,-6.8) W6(-3.6,-6.8) W7(-2.8,-6.8) W8(-2,-6.8) W9(-1.2,-6.8) W10(-0.4,-6.8) W11(0.4,-6.8) W12(1.2,-6.8) W13(2,-6.8) W14(2.8,-6.8) W15(3.6,-6.8) W16(4.4,-6.8) W17(5.2,-6.8) W18(6,-6.8) W19(6.8,-6.8) W20(7.6,-6.8) Y1(-7.6,-7.6) Y2(-6.8,-7.6) Y3(-6,-7.6) Y4(-5.2,-7.6) Y5(-4.4,-7.6) Y6(-3.6,-7.6) Y7(-2.8,-7.6) Y8(-2,-7.6) Y9(-1.2,-7.6) Y10(-0.4,-7.6) Y11(0.4,-7.6) Y12(1.2,-7.6) Y13(2,-7.6) Y14(2.8,-7.6) Y15(3.6,-7.6) Y16(4.4,-7.6) Y17(5.2,-7.6) Y18(6,-7.6) Y19(6.8,-7.6) Y20(7.6,-7.6)
  silkscreen extent -10.04,-9.14 9.14,9.14, body extent -8.5,-8.5 8.5,8.5, height 1
LT3508EUF [mm] "LT3508EUF"
  rect 0.7x0.25 smd: 1(-1.9,1.25) 2(-1.9,0.75) 3(-1.9,0.25) 4(-1.9,-0.25) 5(-1.9,-0.75) 6(-1.9,-1.25) 13(1.9,-1.25) 14(1.9,-0.75) 15(1.9,-0.25) 16(1.9,0.25) 17(1.9,0.75) 18(1.9,1.25)
  rect 0.25x0.7 smd: 7(-1.25,-1.9) 8(-0.75,-1.9) 9(-0.25,-1.9) 10(0.25,-1.9) 11(0.75,-1.9) 12(1.25,-1.9) 19(1.25,1.9) 20(0.75,1.9) 21(0.25,1.9) 22(-0.25,1.9) 23(-0.75,1.9) 24(-1.25,1.9)
  rect 2.45x2.45 smd: 25(0,0)
  silkscreen extent -3.06,-2.3 2.3,2.3, body extent -2.05,-2.05 2.05,2.05, height 0.8
MMBT2222ALT-1 [mm] "MMBT2222ALT-1"
  rect 1x1.4 smd: 1(0.956,1.1) 2(-0.944,1.1) 3(0.006,-1.1)
  silkscreen extent -1.5,0 1.51,0, body extent -1.45,-1.12 1.45,1.38, height 1.2
PJ_002A_3P [mm] "PJ_002A_3P"
  oval 2x4.5 hole 1.016 slot 3.556 at 90 deg: 1(-6.35,-0.6)
  oval 2x4 hole 1.016 slot 3.048 at 90 deg: 2(-0.35,-0.6)
  oval 4x2 hole 1.016 slot 3.048 at 0 deg: 3(-3.35,4.1)
  silkscreen extent -7.18,-5.23 7.48,4.03, body extent -7.07,-5.34 7.33,4.06, height 11.1
R0201 [mm] "R0201"
  rect 0.35x0.48 smd: 1(-0.275,0) 2(0.275,0)
  silkscreen extent -0.58,-0.43 0.58,0.43, body extent -0.3,-0.15 0.3,0.15, height 0.22
R0402 [mm] "R0402"
  rect 0.65x0.65 smd: 1(-0.45,0) 2(0.45,0)
  silkscreen extent 0,-0.38 0,0.38, body extent -0.5,-0.25 0.5,0.25, height 0.35
R0603 [mm] "R0603"
  rect 0.95x1 smd: 1(-0.8,0) 2(0.8,0)
  silkscreen extent 0,-0.5 0,0.5, body extent -0.8,-0.42 0.8,0.38, height 0.45
RLP-100 [mm] "RLP-100"
  rect 0.65x0.65 smd: 1(0,0.45) 2(0,-0.45)
  silkscreen extent -0.38,0 0.38,0, body extent -0.25,-0.5 0.25,0.5, height 0.35
RLP-101 [mm] "RLP-101"
  rect 1x0.95 smd: 1(0,0.8) 2(0,-0.8)
  silkscreen extent -0.5,0 0.5,0, body extent -0.42,-0.8 0.38,0.8, height 0.45
RLP-103 [mm] "RLP-103"
  rect 1.16x1.82 smd: 1(-1.475,0) 2(1.475,0)
  silkscreen extent -1.95,-1.15 1.95,1.15, body extent -1.6,-0.76 1.6,0.84, height 0.6
RLP-130-A [mm] "RLP-130-A"
  rect 0.65x0.65 smd: 1(0,0.45) 2(0,-0.45)
  silkscreen extent -0.38,0 0.38,0, body extent -0.26,-0.5 0.26,0.5, height 0.52
RLP-133 [mm] "RLP-133"
  rect 1.5x1.3 smd: 1(0,-0.95) 2(0,0.95)
  silkscreen extent -1,-2 1,2, body extent -0.64,-1 0.64,1, height 1.27
RLP-134 [mm] "RLP-134"
  rect 1.8x1.6 smd: 1(0,1.399) 2(0,-1.399)
  silkscreen extent -1.5,-2.5 1.5,2.5, body extent -0.86,-1.6 0.76,1.6, height 1.65
SO8_50_244 [mm] "SO8_50_244"
  rect 1.55x0.6 smd: 1(-2.7,1.905) 2(-2.7,0.635) 3(-2.7,-0.635) 4(-2.7,-1.905) 5(2.7,-1.905) 6(2.7,-0.635) 7(2.7,0.635) 8(2.7,1.905)
  silkscreen extent -4.81,-2.7 2.2,2.7, body extent -3,-2.45 3,2.45, height 1.75
SO8_MX25L12833FM2I10G [mm] "SO8_MX25L12833FM2I10G"
  rect 1.6x1 smd: 1(-3.4,1.905) 2(-3.4,0.635) 3(-3.4,-0.635) 4(-3.4,-1.905) 5(3.4,-1.905) 6(3.4,-0.635) 7(3.4,0.635) 8(3.4,1.905)
  silkscreen extent -3.8,-2.92 2.94,3.28, body extent -3.23,-2.5 2.97,2.5, height 1.83
SPD62R [mm] "SPD62R"
  rect 1.8x2.3 smd: 1(0,3.15) 2(0,-3.15)
  silkscreen extent -3.1,-4.7 3.1,4.7, body extent -3.1,-2.82 3.1,3.08, height 2.9
TP_1MM [mm] "TP"
  round 1 smd: 1(0,0)
TQFP64_0P5_12P2X12P2_H1P6 [mm] "TQFP64_0P5_12P2X12P2_H1P6"
  rect 1.108x0.321 smd: 1(-5.8,3.75) 2(-5.8,3.25) 3(-5.8,2.75) 4(-5.8,2.25) 5(-5.8,1.75) 6(-5.8,1.25) 7(-5.8,0.75) 8(-5.8,0.25) 9(-5.8,-0.25) 10(-5.8,-0.75) 11(-5.8,-1.25) 12(-5.8,-1.75) 13(-5.8,-2.25) 14(-5.8,-2.75) 15(-5.8,-3.25) 16(-5.8,-3.75) 33(5.8,-3.75) 34(5.8,-3.25) 35(5.8,-2.75) 36(5.8,-2.25) 37(5.8,-1.75) 38(5.8,-1.25) 39(5.8,-0.75) 40(5.8,-0.25) 41(5.8,0.25) 42(5.8,0.75) 43(5.8,1.25) 44(5.8,1.75) 45(5.8,2.25) 46(5.8,2.75) 47(5.8,3.25) 48(5.8,3.75)
  rect 0.321x1.108 smd: 17(-3.75,-5.8) 18(-3.25,-5.8) 19(-2.75,-5.8) 20(-2.25,-5.8) 21(-1.75,-5.8) 22(-1.25,-5.8) 23(-0.75,-5.8) 24(-0.25,-5.8) 25(0.25,-5.8) 26(0.75,-5.8) 27(1.25,-5.8) 28(1.75,-5.8) 29(2.25,-5.8) 30(2.75,-5.8) 31(3.25,-5.8) 32(3.75,-5.8) 49(3.75,5.8) 50(3.25,5.8) 51(2.75,5.8) 52(2.25,5.8) 53(1.75,5.8) 54(1.25,5.8) 55(0.75,5.8) 56(0.25,5.8) 57(-0.25,5.8) 58(-0.75,5.8) 59(-1.25,5.8) 60(-1.75,5.8) 61(-2.25,5.8) 62(-2.75,5.8) 63(-3.25,5.8) 64(-3.75,5.8)
  silkscreen extent -5.77,-4.71 4.7,5.77, body extent -6.01,-6.01 6.01,6.01, height 1.55
UDFN6_040 [mm] "UDFN6_040"
  rect 0.22x0.42 smd: 1(7.245,-4.389) 2(7.645,-4.389) 3(8.045,-4.389) 4(8.045,-3.739) 5(7.645,-3.739) 6(7.245,-3.739)
  silkscreen extent 6.79,-4.81 8.5,-3.31, body extent 7.05,-4.55 8.25,-3.56, height 0.56
V12P10 [mm] "V12P10"
  rect 1.4x1.27 smd: 1(-1.039,-2.766) 2(1.039,-2.766)
  rect 4.8x4.72 smd: 3(0,1.039)
  silkscreen extent -2.75,-3.53 2.75,3.75, body extent -2.31,-3.23 2.29,3.27, height 1.2
XTAL_4P_7M [mm] "XTAL_4P_7M"
  rect 1.4x1.2 smd: 1(-1.1,-0.85) 2(1.1,-0.85) 3(1.1,0.85) 4(-1.1,0.85)
  silkscreen extent -2.69,-1.43 0.15,1.43, body extent -1.6,-1.25 1.6,1.25, height 0.8